# Altium PCB PCB2.PcbDoc (part 1 of 4)
Units mm, origin at the board's own origin, x right, y up, seen from the top; angles counter-clockwise.
Board outline 100 x 100 mm, 4 copper layers (TOP-SIG, GND1, GND2, BOT-SIG), stack 1.586 mm thick; 331 components, 152 nets, 869 pads, 934 vias.
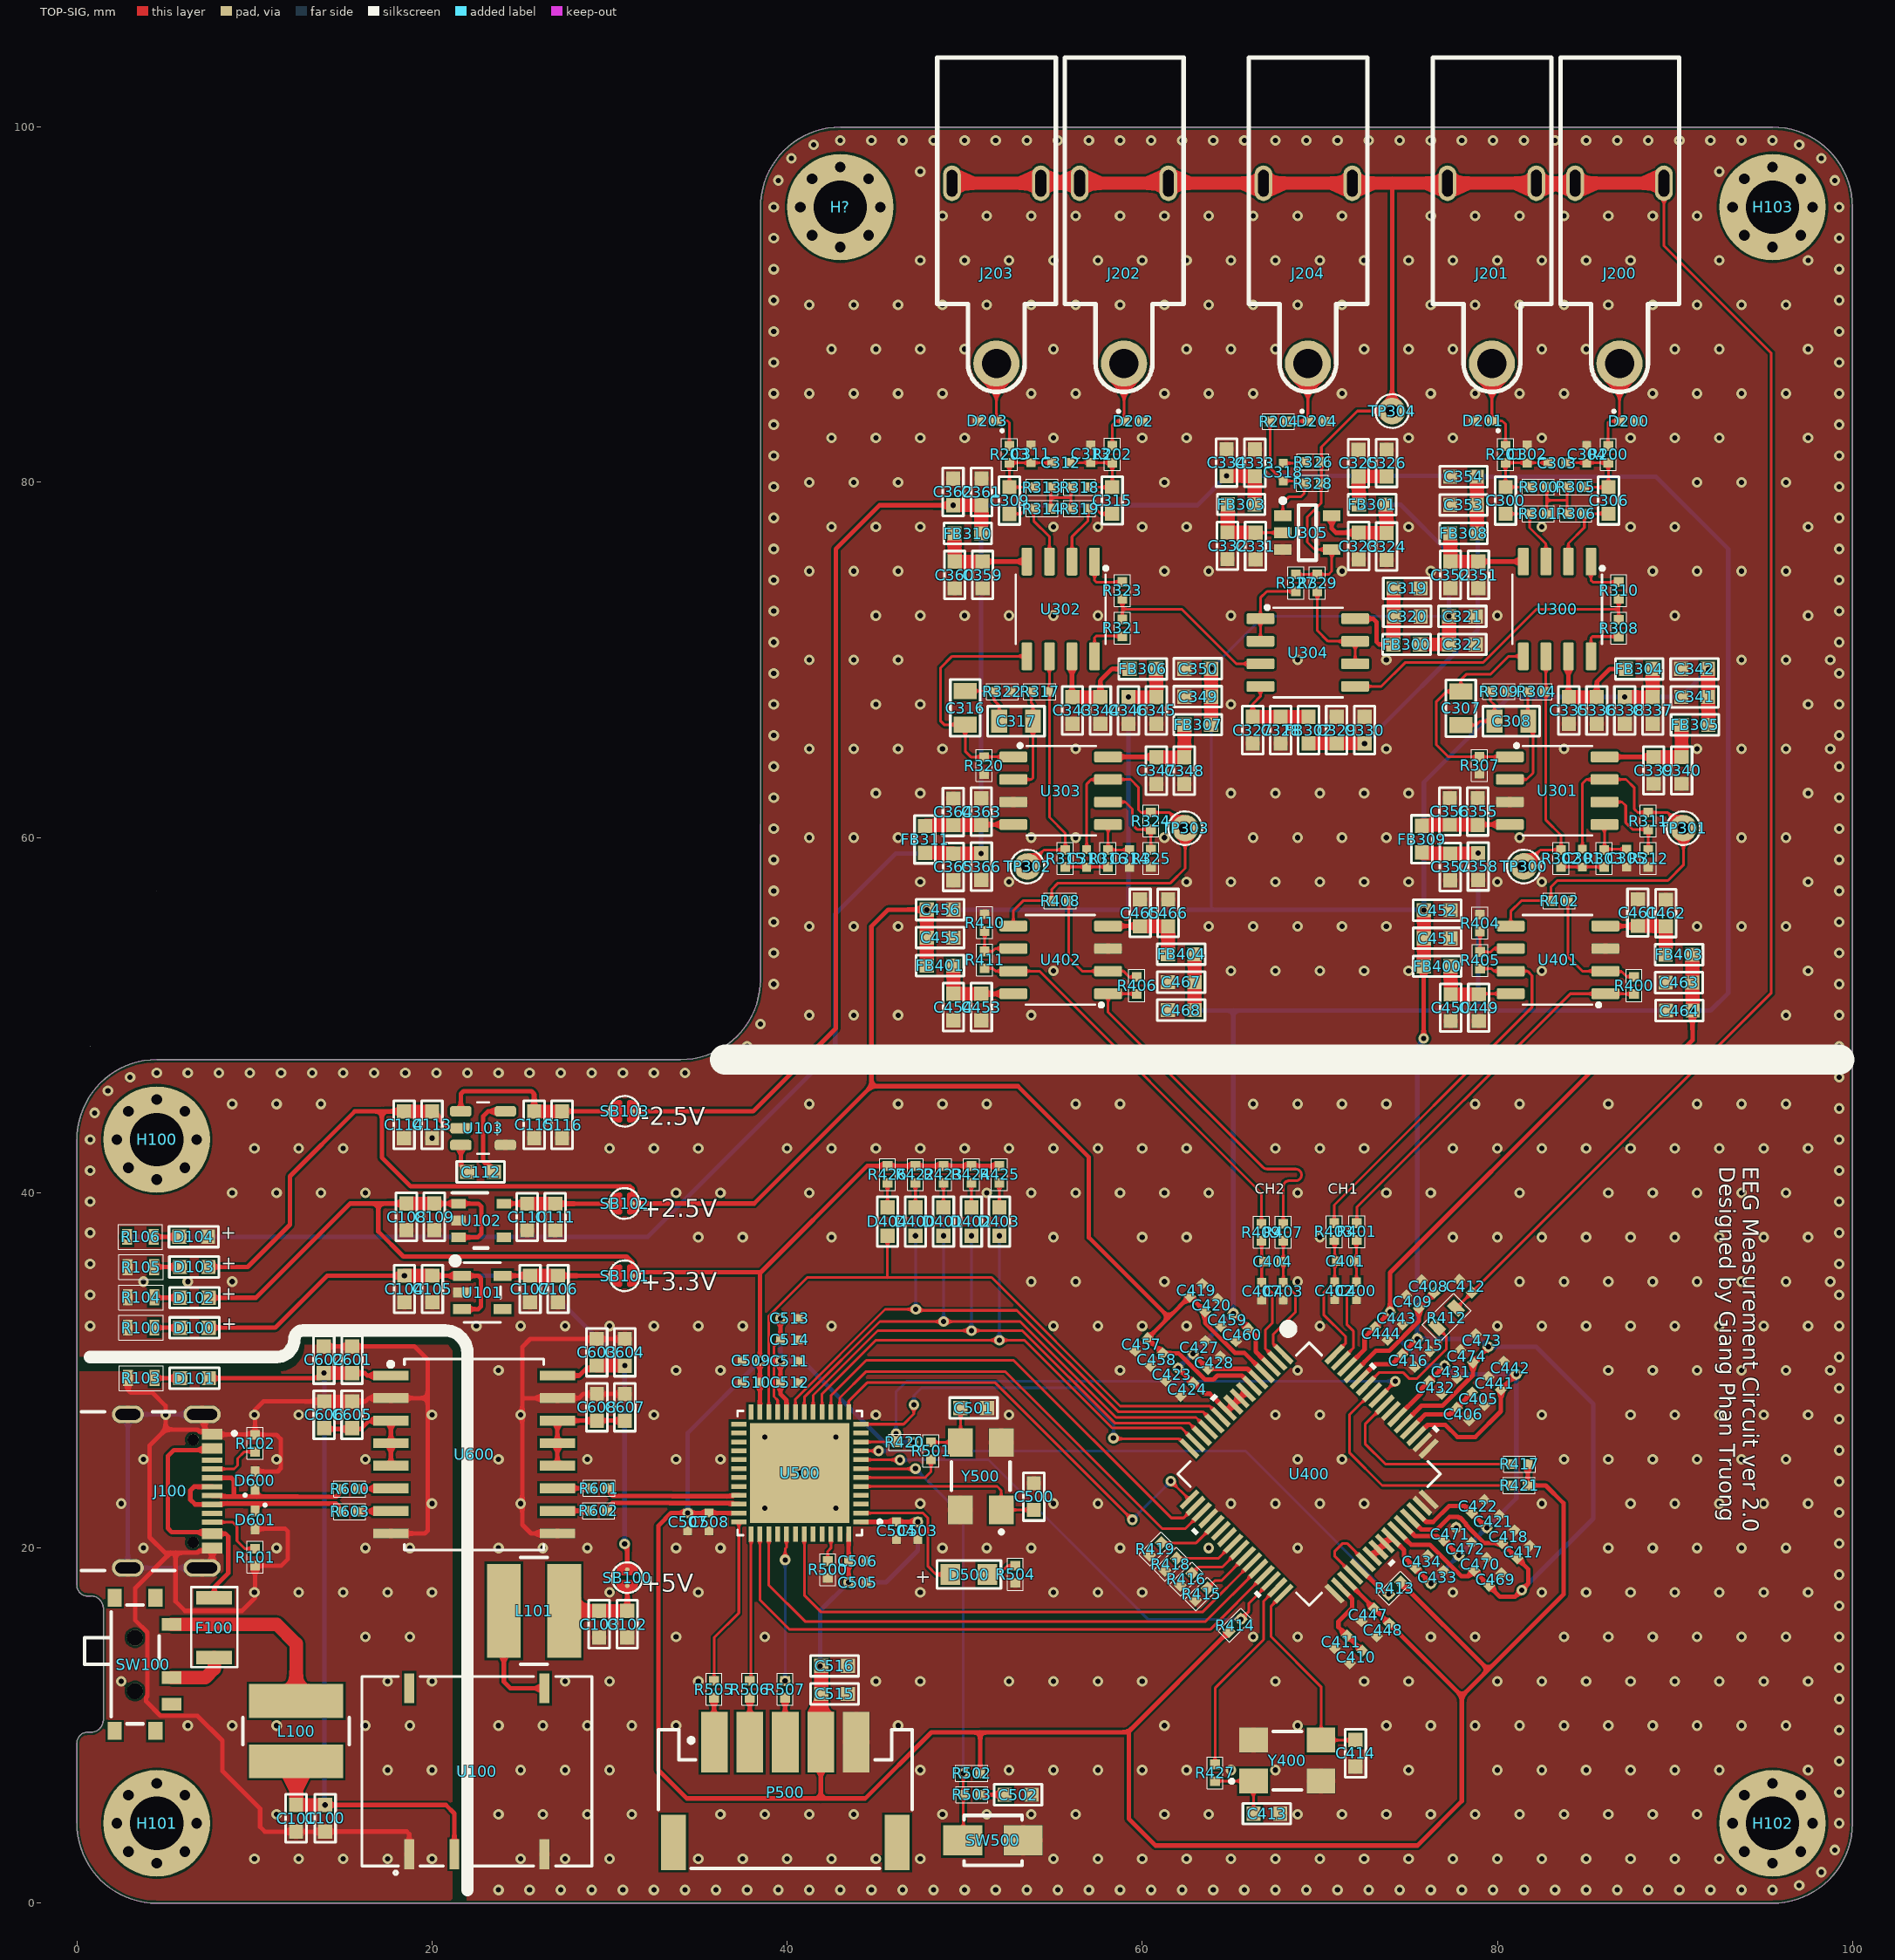
[diagram p0: TOP-SIG view]
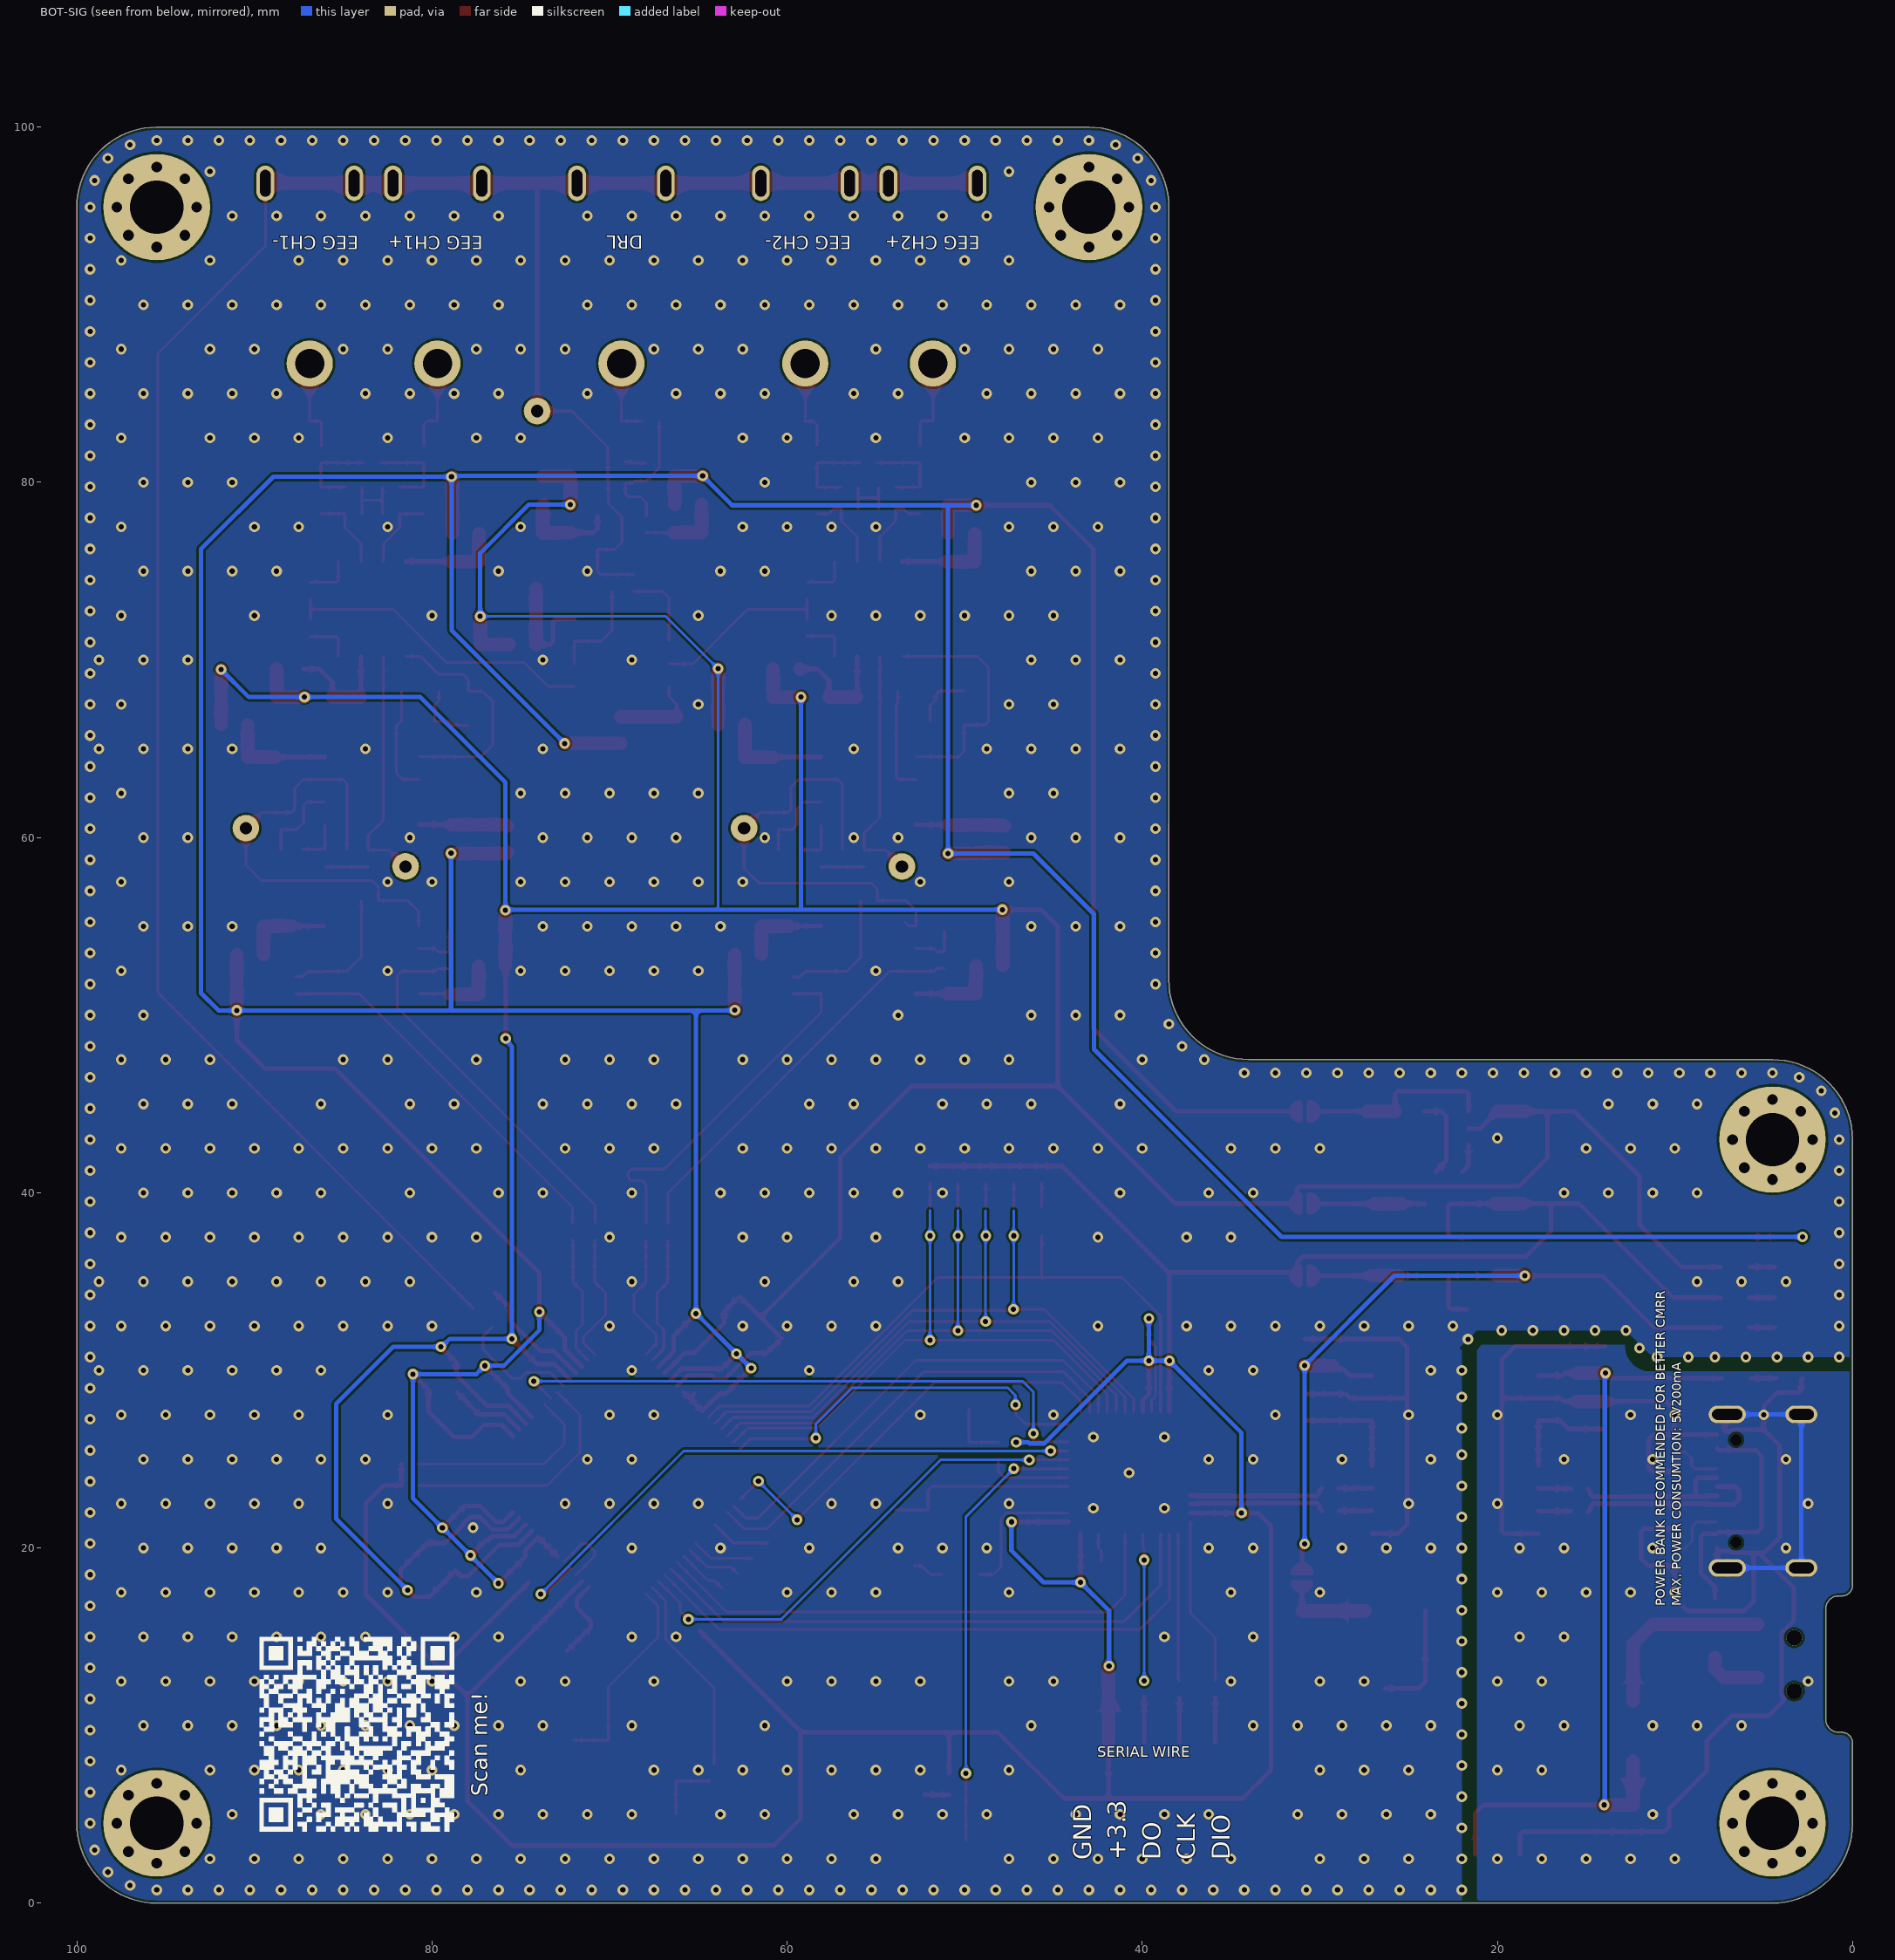
[diagram p1: BOT-SIG view, seen from below]
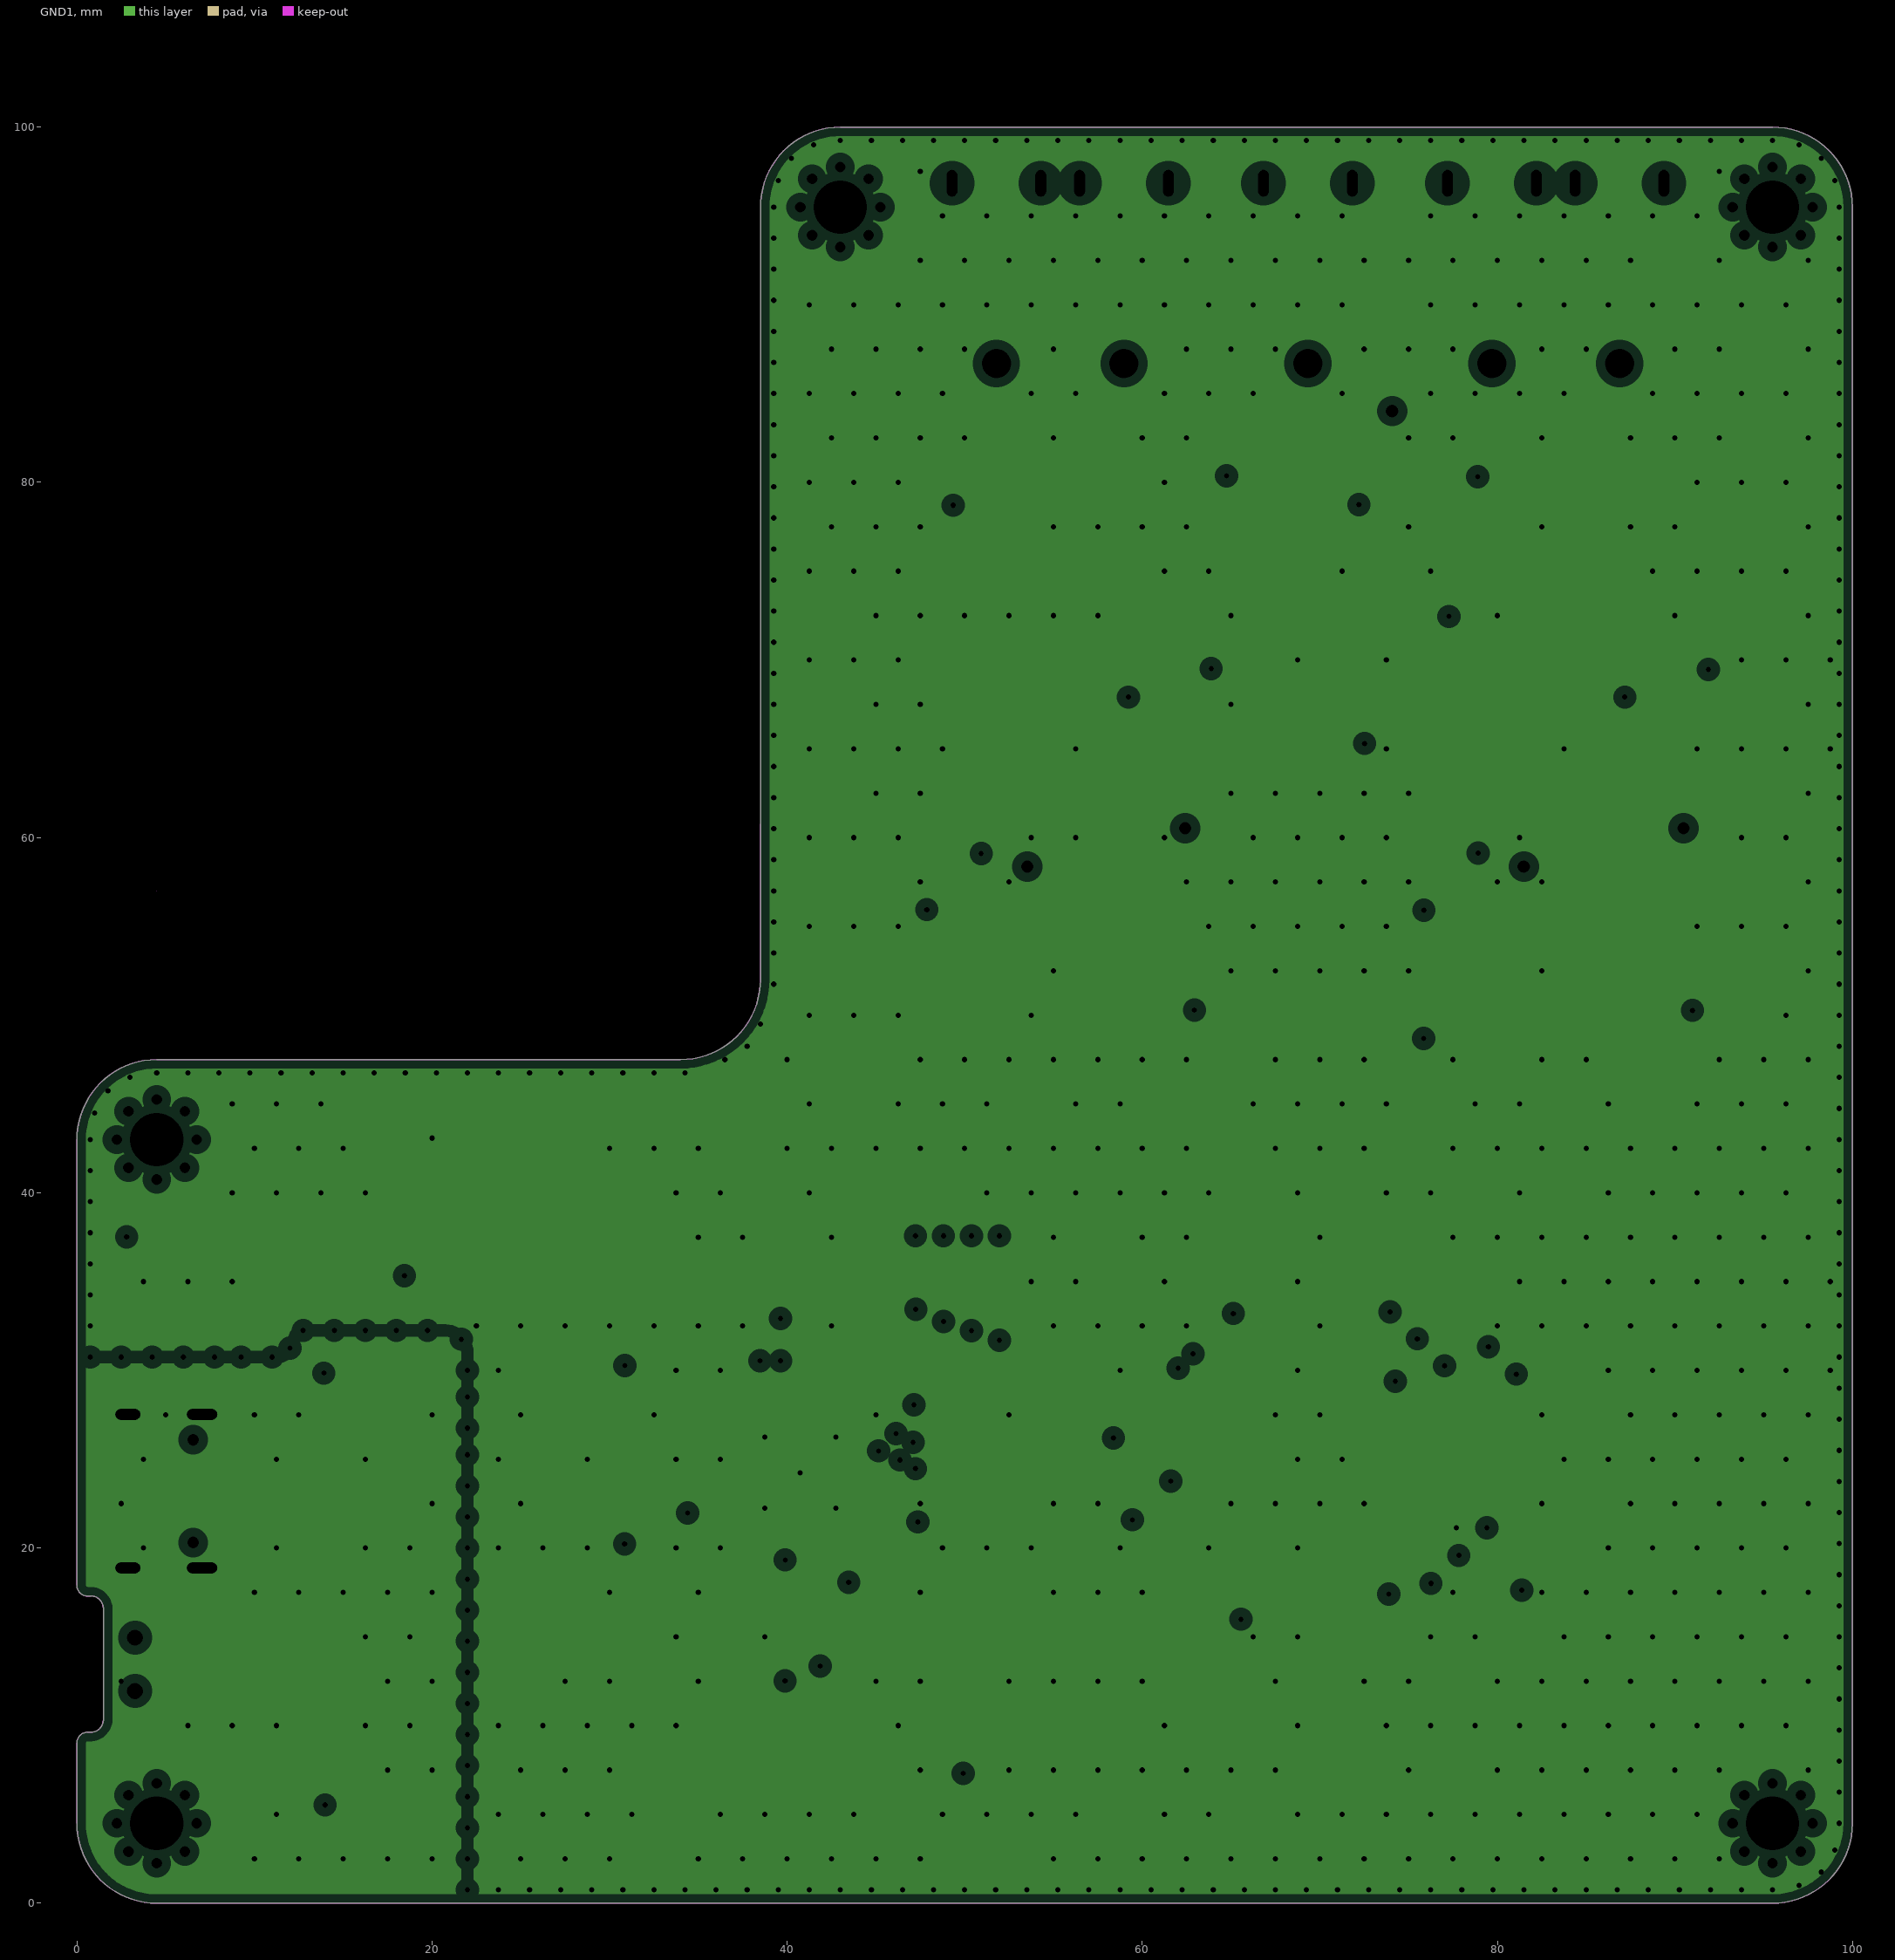
[diagram p2: GND1, clearances drawn from the general rule]
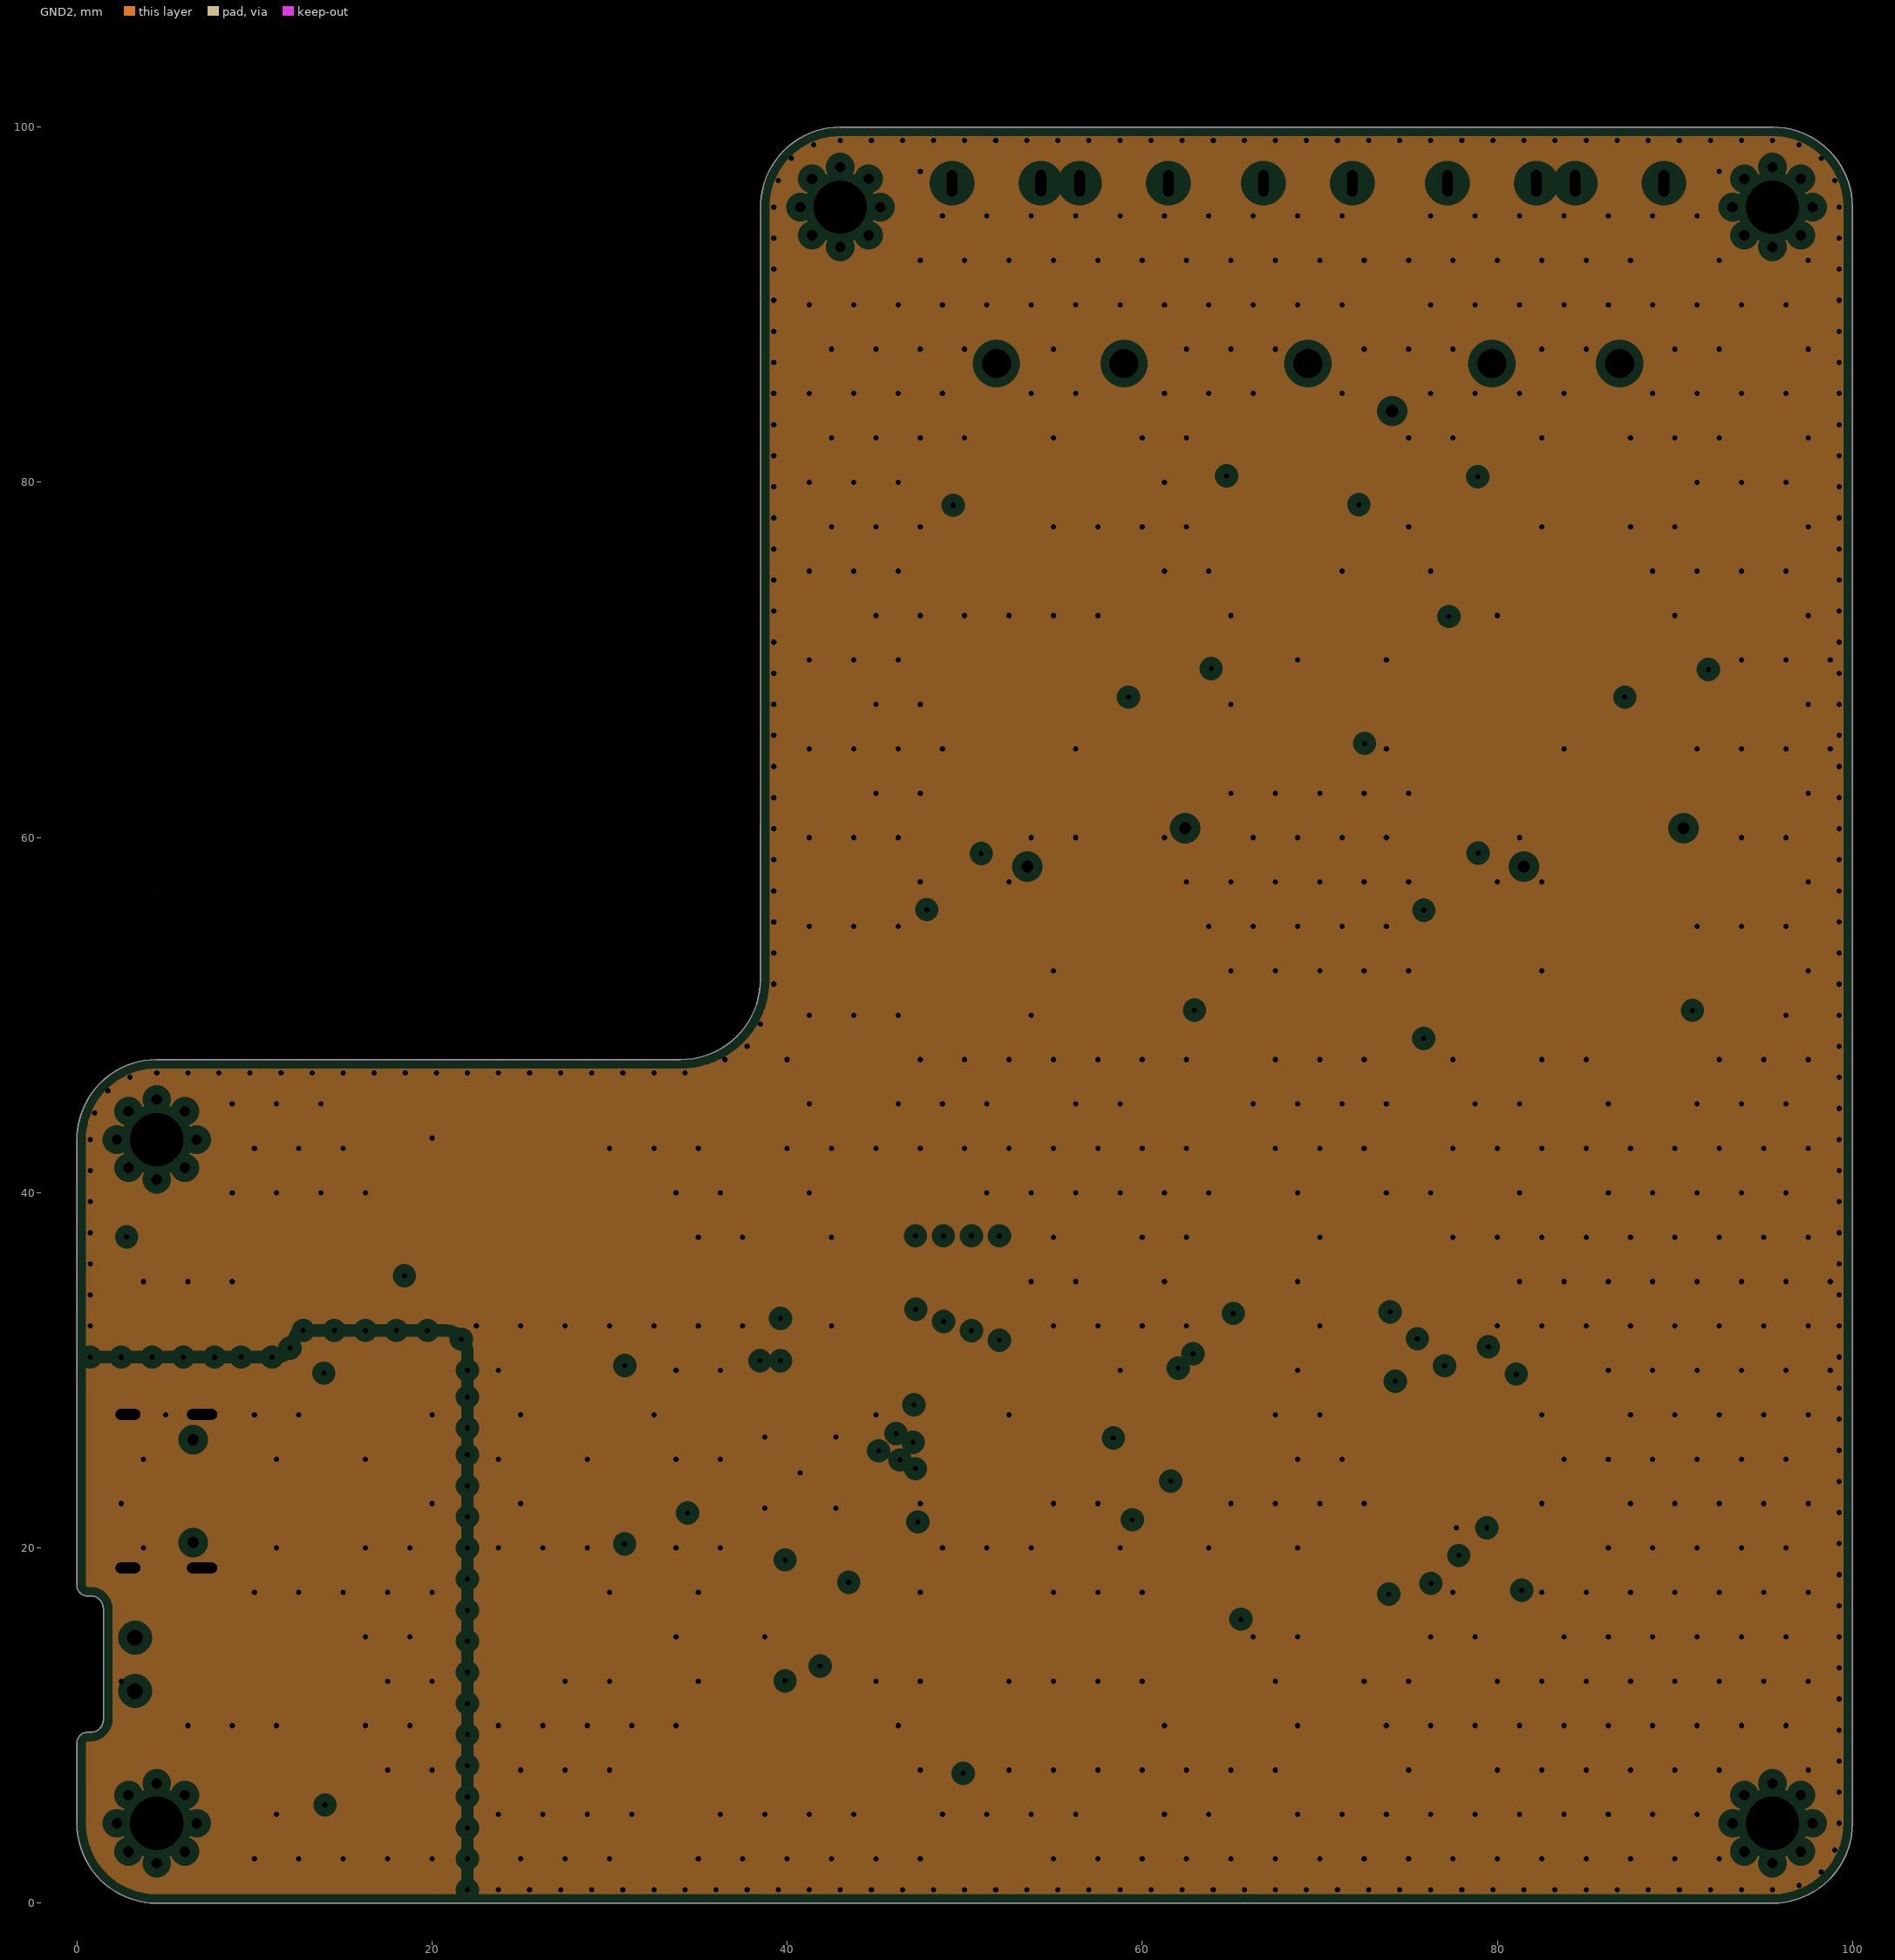
[diagram p3: GND2, clearances drawn from the general rule]
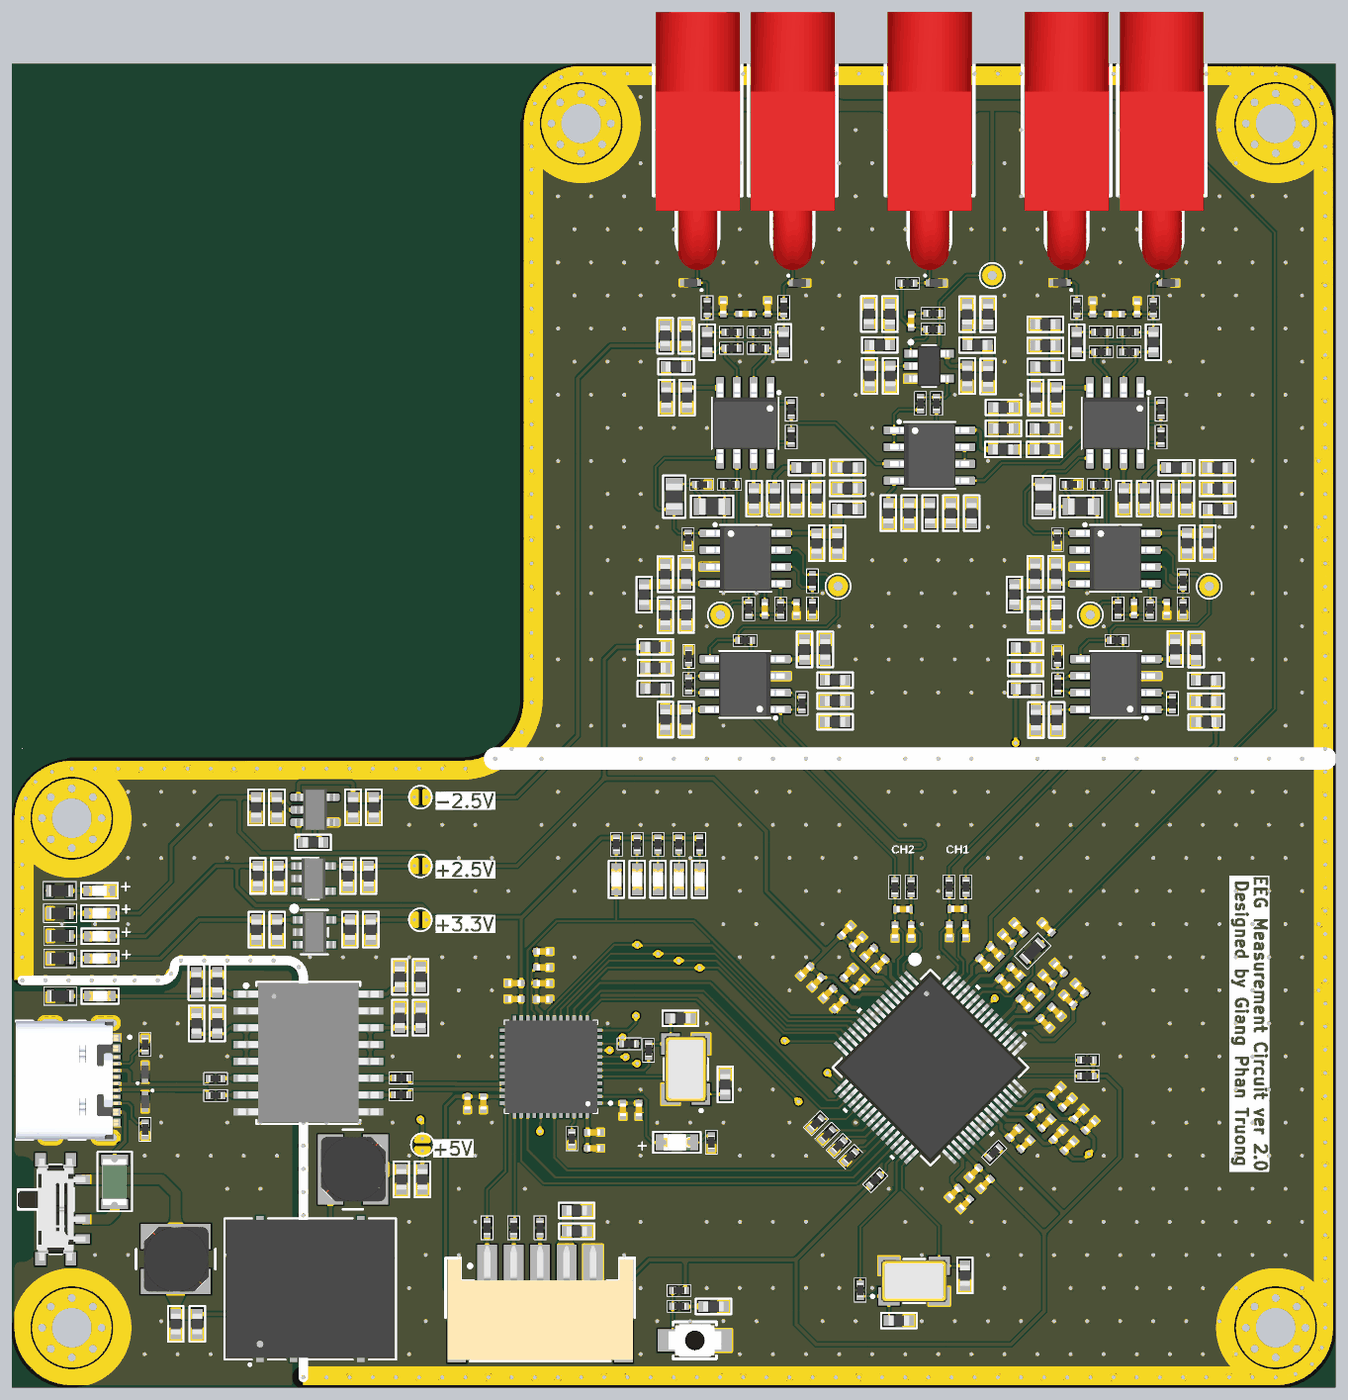
[diagram p6: 3D render of the assembled board from above, using the file's embedded part models]

## Layer stack, top to bottom
Top Solder: solder mask 0.0069, Solder Resist, Dk 3.5
TOP-SIG: signal copper 0.035
Dielectric 2: prepreg 0.2104, PP-006, Dk 4.1
GND1: plane copper 0.0152, net (Multiple Nets)
Dielectric 1: dielectric 1.065, FR-4, Dk 4.8
GND2: plane copper 0.0152, net (Multiple Nets)
Dielectric 3: prepreg 0.2104, PP-006, Dk 4.1
BOT-SIG: signal copper 0.035
Bottom Solder: solder mask 0.0069, Solder Resist, Dk 3.5

## Board outline
0,4.5 0,9.025 cw(c0.6,9.025) 0.6,9.625 0.775,9.625 ccw(c0.775,10.35) 1.5,10.35 1.5,16.575 ccw(c0.775,16.575) 0.775,17.3 0.6,17.3 cw(c0.6,17.9) 0,17.9 0,43 cw(c4.5,43) 4.5,47.5 34,47.5 ccw(c34,52) 38.5,52 38.5,60.75 38.5,95.5 cw(c43,95.5) 43,100 95.5,100 cw(c95.5,95.5) 100,95.5 100,4.5 cw(c95.5,4.5) 95.5,0 4.5,0 cw(c4.5,4.5)

## Design rules (kind name [scope] priority, off if disabled: settings)
Clearance [All] p1: gap=0.125 ignorepadtopadclearanceinfootprint=TRUE
DiffPairsRouting DiffPairsRouting_USB [InDifferentialPairClass('All Differential Pairs')] p1: maxlimit=0.127 minlimit=0.127 mostfreqgap=0.127 toplayer_minwidth=0.263 toplayer_maxwidth=0.263 toplayer_prefwidth=0.263 bottomlayer_minwidth=0.263 bottomlayer_maxwidth=0.263 bottomlayer_prefwidth=0.263 impedanceprofiledriven=TRUE impedanceprofileid={04F33A00-17A3-4157-AAFC-BDDB0F50402A} impedanceprofilevalue=90.000000 maxuncoupledlength=12.7
PlaneClearance [All] p1: clearance=0.508
PlaneConnect [All] p1: planeconnectstyle=Relief reliefexpansion=0.508 reliefentries=4 reliefconductorwidth=0.254 reliefairgap=0.254
PolygonConnect PolygonConnect_1 [All vs IsNamedPolygon('+5_L04_P004')] p1: connectstyle=Direct reliefconductorwidth=0.254 reliefentries=4 polygonreliefangle="90 Angle" airgapwidth=0.254
PolygonConnect [InNet('+5')] p2: connectstyle=Direct reliefconductorwidth=0.254 reliefentries=4 polygonreliefangle="90 Angle" airgapwidth=0.254
RoutingVias [All] p1: holewidth=0.3 width=0.6 viastyle="Through Hole" minholewidth=0.3 minwidth=0.6 maxholewidth=0.3 maxwidth=0.6
SolderMaskExpansion [All] p1: expansion=0.102 istentingtop=FALSE
SupplyNets "Schematic Supply Nets_28" [InNet('VDD1')] p1: voltage=0.000
SupplyNets "Schematic Supply Nets_27" [InNet('-2.5_U300')] p2: voltage=0.000
SupplyNets "Schematic Supply Nets_25" [InNet('+2.5_U301')] p3: voltage=0.000
SupplyNets "Schematic Supply Nets_24" [InNet('-2.5_U304')] p4: voltage=0.000
SupplyNets "Schematic Supply Nets_23" [InNet('-2.5_U302')] p5: voltage=0.000
SupplyNets "Schematic Supply Nets_21" [InNet('+2.5_U305')] p6: voltage=0.000
SupplyNets "Schematic Supply Nets_20" [InNet('+2.5_U402')] p7: voltage=0.000
SupplyNets "Schematic Supply Nets_19" [InNet('+2.5_U302')] p8: voltage=0.000
SupplyNets "Schematic Supply Nets_18" [InNet('+2.5_U304')] p9: voltage=0.000
SupplyNets "Schematic Supply Nets_17" [InNet('-2.5_U305')] p10: voltage=0.000
SupplyNets "Schematic Supply Nets_16" [InNet('+2.5_U303')] p11: voltage=0.000
SupplyNets "Schematic Supply Nets_15" [InNet('-2.5_U301')] p12: voltage=0.000
SupplyNets "Schematic Supply Nets_14" [InNet('-2.5_U402')] p13: voltage=0.000
SupplyNets "Schematic Supply Nets_12" [InNet('+2.5_U401')] p14: voltage=0.000
SupplyNets "Schematic Supply Nets_11" [InNet('-2.5_U303')] p15: voltage=0.000
SupplyNets "Schematic Supply Nets_10" [InNet('VDD2')] p16: voltage=0.000
SupplyNets "Schematic Supply Nets_8" [InNet('+2.5_U300')] p17: voltage=0.000
SupplyNets "Schematic Supply Nets_7" [InNet('-2.5_U401')] p18: voltage=0.000
SupplyNets "Schematic Supply Nets_6" [InNet('+5_USB')] p19: voltage=0.000
SupplyNets "Schematic Supply Nets_5" [InNet('GND')] p20: voltage=0.000
SupplyNets "Schematic Supply Nets_4" [InNet('+2.5')] p21: voltage=0.000
SupplyNets "Schematic Supply Nets_3" [InNet('-2.5')] p22: voltage=0.000
SupplyNets "Schematic Supply Nets_2" [InNet('+3.3')] p23: voltage=0.000
SupplyNets "Schematic Supply Nets_1" [InNet('USB_GND')] p24: voltage=0.000
SupplyNets "Schematic Supply Nets" [InNet('+5')] p25: voltage=0.000
Width [All] p1: maxlimit=0.75 minlimit=0.15 preferedwidth=0.25
27 further rules are at their usual default settings.

## Classes and differential pairs
component class Designator: ar C100 C101 C102 C103 C104 C105 C106 C107 C108 C109 C110 C111 C112 C113 C114 C115 C116 D100 D101 D102 D103 D104 F100 H100 H101 H102 H103 H? J100 L100 L101 R100 R101 R102 R103 R104 R105 R106 SB100 SB101 SB102 SB103 SW100 U100 U101 U102 U103
differential pair MCU_USB_D: +MCU_USB_D_P -MCU_USB_D_N
differential pair USB_D: +USB_D_P -USB_D_N

## Components (designator, comment, footprint, x,y, rotation, side; value= is the part's Value field where it differs from the comment)
C100 "4.7 uF, 35 VDC" CAP_0603 14.06,4.835 r90 top
C101 "100 nF, 50 VDC" CAP_0603 12.426,4.831 r90 top
C102 "100 nF, 50 VDC" CAP_0603 31.076,15.761 r90 top
C103 "4.7 uF, 35 VDC" CAP_0603 29.491,15.762 r90 top
C104 "2.2 uF, 10 VDC" CAP_0603 18.526,34.631 r90 top
C105 "100 nF, 50 VDC" CAP_0603 20.101,34.631 r90 top
C106 "2.2 uF, 10 VDC" CAP_0603 27.176,34.631 r90 top
C107 "100 nF, 50 VDC" CAP_0603 25.601,34.631 r90 top
C108 "2.2 uF, 10 VDC" CAP_0603 18.638,38.695 r90 top
C109 "100 nF, 50 VDC" CAP_0603 20.213,38.695 r90 top
C110 "100 nF, 50 VDC" CAP_0603 25.443,38.683 r90 top
C111 "2.2 uF, 10 VDC" CAP_0603 27.018,38.683 r90 top
C112 "2.2 uF, 10 VDC" CAP_0603 22.789,41.099 r0 top
C113 "2.2 uF, 10 VDC" CAP_0603 20.081,43.881 r90 top
C114 "100 nF, 50 VDC" CAP_0603 18.506,43.881 r90 top
C115 "100 nF, 50 VDC" CAP_0603 25.833,43.881 r90 top
C116 "2.2 uF, 10 VDC" CAP_0603 27.407,43.879 r90 top
C300 "4.7 uF, 35 VDC" CAP_0603 80.538,79.027 r90 top
C301 "10nF" WCAP-CSGP_0402_L1W0.5H0.5 84.792,58.846 r90 top value="10nF, 50V"
C302 "22pF" WCAP-CSGP_0402_L1W0.5H0.5 81.678,81.595 r270 top value="22pF, 50V"
C303 "220pF" WCAP-CSGP_0402_L1W0.5H0.5 83.357,81.097 r180 top value="220pF, 50V"
C304 "22pF" WCAP-CSGP_0402_L1W0.5H0.5 85.036,81.587 r90 top value="22pF, 50V"
C305 "10nF" WCAP-CSGP_0402_L1W0.5H0.5 87.277,58.846 r90 top value="10nF, 50VDC"
C306 "4.7 uF, 35 VDC" CAP_0603 86.34,79.027 r90 top
C307 "33 uF, 6.3 VDC" CAP_0805 77.969,67.257 r270 top
C308 "33 uF, 6.3 VDC" CAP_0805 80.814,66.576 r0 top
C309 "4.7 uF, 35 VDC" CAP_0603 52.599,79.027 r90 top
C310 "10nF" WCAP-CSGP_0402_L1W0.5H0.5 56.873,58.828 r90 top value="10nF, 50VDC"
C311 "22pF" WCAP-CSGP_0402_L1W0.5H0.5 53.74,81.611 r270 top value="22pF, 50V"
C312 "220pF" WCAP-CSGP_0402_L1W0.5H0.5 55.419,81.12 r180 top value="220pF, 50V"
C313 "22pF" WCAP-CSGP_0402_L1W0.5H0.5 57.098,81.619 r90 top value="22pF, 50V"
C314 "10nF" WCAP-CSGP_0402_L1W0.5H0.5 59.282,58.828 r90 top value="10nF, 50VDC"
C315 "4.7 uF, 35 VDC" CAP_0603 58.387,79.031 r90 top
C316 "33 uF, 6.3 VDC" CAP_0805 50.007,67.327 r90 top
C317 "33 uF, 6.3 VDC" CAP_0805 52.922,66.575 r0 top
C318 "1nF" WCAP-CSGP_0402_L1W0.5H0.5 67.941,80.581 r90 top value="1nF, 25V"
C319 "100 nF, 50 VDC" CAP_0603 74.974,73.958 r0 top
C320 "10 uF, 10 VDC" CAP_0603 74.874,72.53 r180 top
C321 "100 nF, 50 VDC" CAP_0603 78.08,72.377 r0 top
C322 "10 uF, 10 VDC" CAP_0603 77.98,70.955 r180 top
C323 "100 nF, 50 VDC" CAP_0603 72.111,76.362 r270 top
C324 "10 uF, 10 VDC" CAP_0603 73.838,76.435 r90 top
C325 "100 nF, 50 VDC" CAP_0603 72.254,81.134 r90 top
C326 "10 uF, 10 VDC" CAP_0603 73.686,81.036 r270 top
C327 "100 nF, 50 VDC" CAP_0603 66.145,65.999 r270 top
C328 "10 uF, 10 VDC" CAP_0603 67.872,66.099 r90 top
C329 "100 nF, 50 VDC" CAP_0603 71.022,66.099 r90 top
C330 "10 uF, 10 VDC" CAP_0603 72.444,65.999 r270 top
C331 "100 nF, 50 VDC" CAP_0603 66.304,76.362 r270 top
C332 "10 uF, 10 VDC" CAP_0603 64.88,76.476 r90 top
C333 "100 nF, 50 VDC" CAP_0603 66.42,81.148 r90 top
C334 "10 uF, 10 VDC" CAP_0603 64.677,81.061 r270 top
C335 "100 nF, 50 VDC" CAP_0603 83.952,67.111 r270 top
C336 "10 uF, 10 VDC" CAP_0603 85.679,67.211 r90 top
C337 "100 nF, 50 VDC" CAP_0603 88.676,67.111 r270 top
C338 "10 uF, 10 VDC" CAP_0603 87.254,67.211 r90 top
C339 "100 nF, 50 VDC" CAP_0603 88.727,63.731 r270 top
C340 "10 uF, 10 VDC" CAP_0603 90.454,63.832 r90 top
C341 "100 nF, 50 VDC" CAP_0603 91.064,67.998 r180 top
C342 "10 uF, 10 VDC" CAP_0603 91.154,69.42 r0 top
C343 "100 nF, 50 VDC" CAP_0603 55.995,67.11 r270 top
C344 "10 uF, 10 VDC" CAP_0603 57.722,67.21 r90 top
C345 "100 nF, 50 VDC" CAP_0603 60.719,67.108 r270 top
C346 "10 uF, 10 VDC" CAP_0603 59.297,67.21 r90 top
C347 "100 nF, 50 VDC" CAP_0603 60.719,63.719 r270 top
C348 "10 uF, 10 VDC" CAP_0603 62.447,63.818 r90 top
C349 "100 nF, 50 VDC" CAP_0603 63.082,68.01 r180 top
C350 "10 uF, 10 VDC" CAP_0603 63.183,69.432 r0 top
C351 "100 nF, 50 VDC" CAP_0603 78.858,74.74 r270 top
C352 "10 uF, 10 VDC" CAP_0603 77.435,74.841 r90 top
C353 "100 nF, 50 VDC" CAP_0603 78.047,78.806 r180 top
C354 "10 uF, 10 VDC" CAP_0603 78.146,80.243 r0 top
C355 "100 nF, 50 VDC" CAP_0603 78.974,61.518 r90 top
C356 "10 uF, 10 VDC" CAP_0603 77.246,61.42 r270 top
C357 "100 nF, 50 VDC" CAP_0603 77.272,58.295 r270 top
C358 "10 uF, 10 VDC" CAP_0603 79,58.421 r90 top
C359 "100 nF, 50 VDC" CAP_0603 50.936,74.735 r270 top
C360 "10 uF, 10 VDC" CAP_0603 49.514,74.837 r90 top
C361 "100 nF, 50 VDC" CAP_0603 51.024,79.509 r90 top
C362 "10 uF, 10 VDC" CAP_0603 49.272,79.409 r270 top
C363 "100 nF, 50 VDC" CAP_0603 51.011,61.509 r90 top
C364 "10 uF, 10 VDC" CAP_0603 49.284,61.393 r270 top
C365 "100 nF, 50 VDC" CAP_0603 49.29,58.296 r270 top
C366 "10 uF, 10 VDC" CAP_0603 51.017,58.413 r90 top
C400 "220pF" WCAP-CSGP_0402_L1W0.5H0.5 72.065,34.48 r90 top value="270pF, 50V"
C401 "680pF" WCAP-CSGP_0402_L1W0.5H0.5 71.451,36.159 r0 top value="680pF, 50V"
C402 "220pF" WCAP-CSGP_0402_L1W0.5H0.5 70.84,34.48 r270 top value="270pF, 50V"
C403 "220pF" WCAP-CSGP_0402_L1W0.5H0.5 67.95,34.45 r90 top value="270pF, 50V"
C404 "680pF" WCAP-CSGP_0402_L1W0.5H0.5 67.33,36.129 r0 top value="680pF, 50V"
C405 "1μF" WCAP-CSGP_0402_L1W0.5H0.5 78.93,28.4 r135 top value="1uF, 16V"
C406 "100nF" WCAP-CSGP_0402_L1W0.5H0.5 78.062,27.533 r315 top value="100nF, 50V"
C407 "220pF" WCAP-CSGP_0402_L1W0.5H0.5 66.726,34.45 r270 top value="270pF, 50V"
C408 "1μF" WCAP-CSGP_0402_L1W0.5H0.5 76.096,34.726 r315 top value="1uF, 16V"
C409 "100nF" WCAP-CSGP_0402_L1W0.5H0.5 75.227,33.868 r135 top value="100nF, 50V"
C410 "1μF" WCAP-CSGP_0402_L1W0.5H0.5 72.041,13.861 r45 top value="1uF, 16V"
C411 "100nF" WCAP-CSGP_0402_L1W0.5H0.5 71.187,14.71 r225 top value="100nF, 50V"
C412 "100nF" WCAP-CSGP_0402_L1W0.5H0.5 78.21,34.741 r315 top value="100nF, 50V"
C413 "27 pF, 50 VDC" CAP_0603 66.968,5.118 r180 top
C414 "27 pF, 50 VDC" CAP_0603 72.087,8.495 r90 top
C415 "1μF" WCAP-CSGP_0402_L1W0.5H0.5 75.846,31.426 r315 top value="1uF, 16V"
C416 "100nF" WCAP-CSGP_0402_L1W0.5H0.5 74.989,30.552 r135 top value="100nF, 50V"
C417 "1μF" WCAP-CSGP_0402_L1W0.5H0.5 81.47,19.78 r45 top value="1uF, 16V"
C418 "100nF" WCAP-CSGP_0402_L1W0.5H0.5 80.62,20.64 r225 top value="100nF, 50V"
C419 "1μF" WCAP-CSGP_0402_L1W0.5H0.5 63.035,34.516 r45 top value="1uF, 16V"
C420 "100nF" WCAP-CSGP_0402_L1W0.5H0.5 63.893,33.671 r225 top value="100nF, 50V"
C421 "1μF" WCAP-CSGP_0402_L1W0.5H0.5 79.765,21.491 r45 top value="1uF, 16V"
C422 "100nF" WCAP-CSGP_0402_L1W0.5H0.5 78.914,22.342 r225 top value="100nF, 50V"
C423 "1μF" WCAP-CSGP_0402_L1W0.5H0.5 61.671,29.773 r225 top value="1uF, 16V"
C424 "100nF" WCAP-CSGP_0402_L1W0.5H0.5 62.524,28.923 r45 top value="100nF, 50V"
C427 "1μF" WCAP-CSGP_0402_L1W0.5H0.5 63.208,31.3 r45 top value="1uF, 16V"
C428 "100nF" WCAP-CSGP_0402_L1W0.5H0.5 64.052,30.441 r225 top value="100nF, 50V"
C431 "1μF" WCAP-CSGP_0402_L1W0.5H0.5 77.38,29.91 r315 top value="1uF, 16V"
C432 "100nF" WCAP-CSGP_0402_L1W0.5H0.5 76.506,29.024 r135 top value="100nF, 50V"
C433 "1μF" WCAP-CSGP_0402_L1W0.5H0.5 76.611,18.359 r45 top value="1uF, 16V"
C434 "100nF" WCAP-CSGP_0402_L1W0.5H0.5 75.733,19.233 r225 top value="100nF, 50V"
C441 "1μF" WCAP-CSGP_0402_L1W0.5H0.5 79.848,29.276 r135 top value="1uF, 16V"
C442 "100nF" WCAP-CSGP_0402_L1W0.5H0.5 80.715,30.145 r315 top value="100nF, 50V"
C443 "1μF" WCAP-CSGP_0402_L1W0.5H0.5 74.31,32.94 r315 top value="1uF, 16V"
C444 "100nF" WCAP-CSGP_0402_L1W0.5H0.5 73.46,32.07 r135 top value="100nF, 50V"
C447 "1μF" WCAP-CSGP_0402_L1W0.5H0.5 72.706,16.237 r225 top value="1uF, 16V"
C448 "100nF" WCAP-CSGP_0402_L1W0.5H0.5 73.564,15.384 r45 top value="100nF, 50V"
C449 "100 nF, 50 VDC" CAP_0603 78.874,50.37 r270 top
C450 "10 uF, 10 VDC" CAP_0603 77.452,50.47 r90 top
C451 "100 nF, 50 VDC" CAP_0603 76.662,54.255 r0 top
C452 "10 uF, 10 VDC" CAP_0603 76.561,55.982 r180 top
C453 "100 nF, 50 VDC" CAP_0603 50.864,50.407 r270 top
C454 "10 uF, 10 VDC" CAP_0603 49.442,50.507 r90 top
C455 "100 nF, 50 VDC" CAP_0603 48.668,54.291 r0 top
C456 "10 uF, 10 VDC" CAP_0603 48.566,56.019 r180 top
C457 "1μF" WCAP-CSGP_0402_L1W0.5H0.5 59.948,31.456 r225 top value="1uF, 16V"
C458 "100nF" WCAP-CSGP_0402_L1W0.5H0.5 60.808,30.614 r45 top value="100nF, 50V"
C459 "1μF" WCAP-CSGP_0402_L1W0.5H0.5 64.776,32.851 r225 top value="1uF, 16V"
C460 "100nF" WCAP-CSGP_0402_L1W0.5H0.5 65.629,32.002 r45 top value="100nF, 50V"
C461 "100 nF, 50 VDC" CAP_0603 87.991,55.823 r90 top
C462 "10 uF, 10 VDC" CAP_0603 89.413,55.696 r270 top
C463 "100 nF, 50 VDC" CAP_0603 90.175,51.911 r180 top
C464 "10 uF, 10 VDC" CAP_0603 90.302,50.184 r0 top
C465 "100 nF, 50 VDC" CAP_0603 59.957,55.805 r90 top
C466 "10 uF, 10 VDC" CAP_0603 61.38,55.706 r270 top
C467 "100 nF, 50 VDC" CAP_0603 62.141,51.936 r180 top
C468 "10 uF, 10 VDC" CAP_0603 62.241,50.209 r0 top
C469 "1μF" WCAP-CSGP_0402_L1W0.5H0.5 79.881,18.229 r45 top value="1uF, 16V"
C470 "100nF" WCAP-CSGP_0402_L1W0.5H0.5 79.036,19.087 r225 top value="100nF, 50V"
C471 "1μF" WCAP-CSGP_0402_L1W0.5H0.5 77.33,20.794 r45 top value="1uF, 16V"
C472 "100nF" WCAP-CSGP_0402_L1W0.5H0.5 78.183,19.937 r225 top value="100nF, 50V"
C473 "1μF" WCAP-CSGP_0402_L1W0.5H0.5 79.14,31.68 r135 top value="1uF, 16V"
C474 "100nF" WCAP-CSGP_0402_L1W0.5H0.5 78.272,30.802 r315 top value="100nF, 50V"
C500 "27 pF, 50 VDC" CAP_0603 53.821,22.841 r270 top
C501 "27 pF, 50 VDC" CAP_0603 50.452,27.961 r180 top
C502 "100 nF, 50 VDC" CAP_0603 53.057,6.033 r0 top
C503 "4.7μF" WCAP-CSGP_0402_L1W0.5H0.5 47.364,20.97 r90 top value="4.7uF, 10V"
C504 "100nF" WCAP-CSGP_0402_L1W0.5H0.5 46.16,20.97 r90 top value="100nF, 50V"
C505 "4.7μF" WCAP-CSGP_0402_L1W0.5H0.5 43.97,18.066 r180 top value="4.7uF, 10V"
C506 "100nF" WCAP-CSGP_0402_L1W0.5H0.5 43.97,19.27 r180 top value="100nF, 50V"
C507 "4.7μF" WCAP-CSGP_0402_L1W0.5H0.5 34.406,21.47 r90 top value="4.7uF, 10V"
C508 "100nF" WCAP-CSGP_0402_L1W0.5H0.5 35.61,21.47 r90 top value="100nF, 50V"
C509 "4.7μF" WCAP-CSGP_0402_L1W0.5H0.5 37.97,30.544 r0 top value="4.7uF, 10V"
C510 "100nF" WCAP-CSGP_0402_L1W0.5H0.5 37.97,29.34 r0 top value="100nF, 50V"
C511 "1μF" WCAP-CSGP_0402_L1W0.5H0.5 40.124,30.524 r0 top value="1uF, 16V"
C512 "100nF" WCAP-CSGP_0402_L1W0.5H0.5 40.124,29.32 r180 top value="100nF, 50V"
C513 "1μF" WCAP-CSGP_0402_L1W0.5H0.5 40.124,32.932 r0 top value="1uF, 16V"
C514 "10nF" WCAP-CSGP_0402_L1W0.5H0.5 40.124,31.728 r180 top value="10nF, 50V"
C515 "1 uF, 16 VDC" CAP_0603 42.622,11.862 r180 top
C516 "100 nF, 50 VDC" CAP_0603 42.721,13.285 r0 top
C601 "1 uF, 16 VDC" CAP_0603 15.429,30.548 r270 top
C602 "100 nF, 50 VDC" CAP_0603 13.986,30.648 r90 top
C603 "1 uF, 16 VDC" CAP_0603 29.209,30.968 r270 top
C604 "100 nF, 50 VDC" CAP_0603 30.936,31.068 r90 top
C605 "100 nF, 50 VDC" CAP_0603 15.576,27.551 r90 top
C606 "1 uF, 16 VDC" CAP_0603 13.849,27.449 r270 top
C607 "1 uF, 16 VDC" CAP_0603 30.788,27.871 r270 top
C608 "100 nF, 50 VDC" CAP_0603 29.365,27.971 r90 top
D100 "Blue, 3.2V" WL-SMCW_0603_H=0.7mm 6.624,32.401 r0 top
D101 "Red, 2V" WL-SMCW_0603_H=0.7mm 6.632,29.56 r0 top
D102 "Yellow, 2V" WL-SMCW_0603_H=0.7mm 6.621,34.09 r0 top
D103 "Green, 3.2V" WL-SMCW_0603_H=0.7mm 6.611,35.826 r0 top
D104 "Pink" WL-SMCW_0603_H=0.7mm 6.584,37.526 r0 top
D200 "TPD1E1B04DPYR" DIO_TPD1E05U06DPYR 87.406,83.441 r0 top
D201 "TPD1E1B04DPYR" DIO_TPD1E05U06DPYR 79.202,83.467 r180 top
D202 "TPD1E1B04DPYR" DIO_TPD1E05U06DPYR 59.509,83.441 r0 top
D203 "TPD1E1B04DPYR" DIO_TPD1E05U06DPYR 51.271,83.466 r180 top
D204 "TPD1E1B04DPYR" DIO_TPD1E05U06DPYR 69.84,83.44 r0 top
D400 "Yellow, 2V" WL-SMCW_0603_H=0.7mm 47.23,38.38 r90 top
D401 "Red, 2V" WL-SMCW_0603_H=0.7mm 48.805,38.38 r90 top
D402 "Green, 3.2V" WL-SMCW_0603_H=0.7mm 50.38,38.38 r90 top
D403 "Blue, 3.2V" WL-SMCW_0603_H=0.7mm 51.955,38.38 r90 top
D404 "Pink" WL-SMCW_0603_H=0.7mm 45.656,38.38 r90 top
D500 "Blue, 3.2V" WL-SMCW_0805 50.24,18.51 r180 top
D600 "TPD1E1B04DPYR" DIO_TPD1E05U06DPYR 10.038,23.811 r90 top
D601 "TPD1E1B04DPYR" DIO_TPD1E05U06DPYR 10.04,21.581 r270 top
F100 "6V, 0.35A" Fuse_SMD_1206 7.731,15.512 r270 top
FB300 "120 Ohms, 2 A" FER_0603 74.94,70.803 r0 top
FB301 "120 Ohms, 2 A" FER_0603 72.9,78.824 r180 top
FB302 "120 Ohms, 2 A" FER_0603 69.294,65.999 r270 top
FB303 "120 Ohms, 2 A" FER_0603 65.621,78.686 r0 top
FB304 "120 Ohms, 2 A" FER_0603 88.042,69.42 r0 top
FB305 "120 Ohms, 2 A" FER_0603 91.181,66.271 r0 top
FB306 "120 Ohms, 2 A" FER_0603 60.084,69.42 r0 top
FB307 "120 Ohms, 2 A" FER_0603 63.181,66.282 r0 top
FB308 "120 Ohms, 2 A" FER_0603 78.146,77.051 r0 top
FB309 "120 Ohms, 2 A" FER_0603 75.672,59.857 r270 top
FB310 "120 Ohms, 2 A" FER_0603 50.225,77.047 r0 top
FB311 "120 Ohms, 2 A" FER_0603 47.689,59.844 r270 top
FB400 "120 Ohms, 2 A" FER_0603 76.562,52.832 r180 top
FB401 "120 Ohms, 2 A" FER_0603 48.561,52.869 r180 top
FB403 "120 Ohms, 2 A" FER_0603 90.281,53.334 r0 top
FB404 "120 Ohms, 2 A" FER_0603 62.247,53.358 r0 top
H100 "Mounting Hole 3mm" "3mm with via" 4.5,43 r0 top
H101 "Mounting Hole 3mm" "3mm with via" 4.5,4.5 r0 top
H102 "Mounting Hole 3mm" "3mm with via" 95.5,4.5 r0 top
H103 "Mounting Hole 3mm" "3mm with via" 95.5,95.5 r0 top
H? "Mounting Hole 3mm" "3mm with via" 43,95.5 r0 top
J100 "USB4105-GF-A" GCT_USB4105-GF-A 2.875,23.202 r270 top value="USB-C 2.0 24-Pin (16+8 Dummy)"
J200 "DIN42802 1.5mm" "DIN42802-1.5MM SOCKET" 86.881,86.692 r90 top value="DIN42802 3-Pin Female Socket"
J201 "DIN42802 1.5mm" "DIN42802-1.5MM SOCKET" 79.693,86.692 r90 top value="DIN42802 3-Pin Female Socket"
J202 "DIN42802 1.5mm" "DIN42802-1.5MM SOCKET" 58.975,86.691 r90 top value="DIN42802 3-Pin Female Socket"
J203 "DIN42802 1.5mm" "DIN42802-1.5MM SOCKET" 51.787,86.691 r90 top value="DIN42802 3-Pin Female Socket"
J204 "DIN42802 1.5mm" "DIN42802-1.5MM SOCKET" 69.33,86.692 r90 top value="DIN42802 3-Pin Female Socket"
L100 "22uH, 1A" Inductor_CDRH4D28 12.354,9.693 r270 top
L101 "47uH, 1A" Inductor_CDRH4D28 25.749,16.462 r0 top
P500 "PH2.0mm 5-PIN" 620105131822 39.9,5.87 r0 top
R100 "Resistor 1 KOhm 0603 1%" R0603 3.622,32.406 r180 top value="1 KOhm/0603/1%"
R101 "Resistor 5.1 KOhm 0402" R0402 10.04,19.485 r90 top value="5.1 KOhm/0402/1%"
R102 "Resistor 5.1 KOhm 0402" R0402 10.04,25.895 r270 top value="5.1 KOhm/0402/1%"
R103 "Resistor 1 KOhm 0603 1%" R0603 3.629,29.568 r0 top value="1 KOhm/0603/1%"
R104 "Resistor 1 KOhm 0603 1%" R0603 3.618,34.111 r180 top value="1 KOhm/0603/1%"
R105 "Resistor 1 KOhm 0603 1%" R0603 3.609,35.816 r180 top value="1 KOhm/0603/1%"
R106 "Resistor 1 KOhm 0603 1%" R0603 3.582,37.521 r180 top value="1 KOhm/0603/1%"
R200 "Resistor 100 KOhm 0402 1%" R0402 86.252,81.578 r270 top value="100 KOhm/0402/1%"
R201 "Resistor 100 KOhm 0402 1%" R0402 80.461,81.578 r270 top value="100 KOhm/0402/1%"
R202 "Resistor 100 KOhm 0402 1%" R0402 58.314,81.582 r270 top value="100 KOhm/0402/1%"
R203 "Resistor 100 KOhm 0402 1%" R0402 52.523,81.578 r270 top value="100 KOhm/0402/1%"
R204 "Resistor 100 KOhm 0402 1%" R0402 67.672,83.428 r180 top value="100 KOhm/0402/1%"
R300 "Resistor 1 MOhm 0402 1%" R0402 82.308,79.74 r180 top value="1 MOhm/0402/1%"
R301 "Resistor 1 MOhm 0402 1%" R0402 82.306,78.237 r180 top value="1 MOhm/0402/1%"
R302 "Resistor 4.22 KOhm 0402 1%" R0402 83.588,58.828 r270 top value="4.22 KOhm/0402/1%"
R303 "Resistor 60.4 KOhm 0402 1%" R0402 86.009,58.829 r90 top value="60.4 KOhm/0402/1%"
R304 "Resistor 138 KOhm 0402 1%" R0402 82.188,68.22 r0 top value="138 KOhm/0402/1%"
R305 "Resistor 1 MOhm 0402 1%" R0402 84.413,79.74 r180 top value="1 MOhm/0402/1%"
R306 "Resistor 1 MOhm 0402 1%" R0402 84.424,78.237 r180 top value="1 MOhm/0402/1%"
R307 "Resistor 0 Ohm 0402" R0402 78.999,64.069 r90 top value="0 Ohm/0402/Jumper"
R308 "Resistor 2.77 KOhm 0402 1%" R0402 86.837,71.795 r270 top value="2.77 KOhm/0402/0.1%"
R309 "Resistor 54.9 KOhm 0402 1%" R0402 80.084,68.227 r180 top value="54.9 KOhm/0402/1%"
R310 "Resistor 2.77 KOhm 0402 1%" R0402 86.837,73.912 r90 top value="2.77 KOhm/0402/0.1%"
R311 "Resistor 100 KOhm 0402 1%" R0402 88.499,60.937 r90 top value="100 KOhm/0402/1%"
R312 "Resistor 10 KOhm 0402 1%" R0402 88.501,58.829 r90 top value="10 KOhm/0402/1%"
R313 "Resistor 1 MOhm 0402 1%" R0402 54.363,79.723 r180 top value="1 MOhm/0402/1%"
R314 "Resistor 1 MOhm 0402 1%" R0402 54.363,78.518 r180 top value="1 MOhm/0402/1%"
R315 "Resistor 4.22 KOhm 0402 1%" R0402 55.669,58.828 r270 top value="4.22 KOhm/0402/1%"
R316 "Resistor 60.4 KOhm 0402 1%" R0402 58.078,58.828 r90 top value="60.4 KOhm/0402/1%"
R317 "Resistor 138 KOhm 0402 1%" R0402 54.231,68.219 r0 top value="138 KOhm/0402/1%"
R318 "Resistor 1 MOhm 0402 1%" R0402 56.468,79.723 r180 top value="1 MOhm/0402/1%"
R319 "Resistor 1 MOhm 0402 1%" R0402 56.471,78.518 r180 top value="1 MOhm/0402/1%"
R320 "Resistor 0 Ohm 0402" R0402 51.093,64.06 r90 top value="0 Ohm/0402/Jumper"
R321 "Resistor 2.77 KOhm 0402 1%" R0402 58.88,71.806 r270 top value="2.77 KOhm/0402/0.1%"
R322 "Resistor 54.9 KOhm 0402 1%" R0402 52.127,68.219 r180 top value="54.9 KOhm/0402/1%"
R323 "Resistor 2.77 KOhm 0402 1%" R0402 58.88,73.911 r90 top value="2.77 KOhm/0402/0.1%"
R324 "Resistor 100 KOhm 0402 1%" R0402 60.487,60.936 r90 top value="100 KOhm/0402/1%"
R325 "Resistor 10 KOhm 0402 1%" R0402 60.487,58.831 r90 top value="10 KOhm/0402/1%"
R326 "Resistor 10 KOhm 0402 1%" R0402 69.617,81.152 r0 top value="10 KOhm/0402/1%"
R327 "Resistor 10 KOhm 0402 1%" R0402 68.65,74.338 r270 top value="10 KOhm/0402/1%"
R328 "Resistor 1 MOhm 0402 1%" R0402 69.596,79.947 r0 top value="1 MOhm/0402/1%"
R329 "Resistor 10 KOhm 0402 1%" R0402 69.861,74.338 r270 top value="10 KOhm/0402/1%"
R400 "Resistor 100 KOhm 0402 1%" R0402 87.702,51.671 r270 top value="100 KOhm/0402/1%"
R401 "Resistor 10 Ohm 0402 1%" R0402 72.085,37.813 r270 top value="10 Ohm/0402/1%"
R402 "Resistor 10 KOhm 0402 1%" R0402 83.495,56.441 r0 top value="10 KOhm/0402/1%"
R403 "Resistor 10 Ohm 0402 1%" R0402 70.815,37.813 r270 top value="10 Ohm/0402/1%"
R404 "Resistor 11 KOhm 0402 5%" R0402 79.02,55.195 r270 top value="11 KOhm/0402/5%"
R405 "Resistor 100 KOhm 0402 1%" R0402 79.026,53.088 r270 top value="100 KOhm/0402/1%"
R406 "Resistor 100 KOhm 0402 1%" R0402 59.694,51.671 r270 top value="100 KOhm/0402/1%"
R407 "Resistor 10 Ohm 0402 1%" R0402 67.942,37.783 r270 top value="10 Ohm/0402/1%"
R408 "Resistor 10 KOhm 0402 1%" R0402 55.385,56.44 r0 top value="10 KOhm/0402/1%"
R409 "Resistor 10 Ohm 0402 1%" R0402 66.714,37.783 r270 top value="10 Ohm/0402/1%"
R410 "Resistor 11 KOhm 0402 5%" R0402 51.128,55.221 r270 top value="11 KOhm/0402/5%"
R411 "Resistor 100 KOhm 0402 1%" R0402 51.128,53.114 r270 top value="100 KOhm/0402/1%"
R412 "Resistor 49.9 Ohm 0603 1%" R0603 77.139,32.968 r225 top value="49.9 Ohm/0603/1%"
R413 "Resistor 10 KOhm 0402 1%" R0402 74.218,17.736 r225 top value="10 KOhm/0402/1%"
R414 "Resistor 10 KOhm 0402 1%" R0402 65.224,15.654 r45 top value="10 KOhm/0402/1%"
R415 "Resistor 10 KOhm 0402 1%" R0402 63.336,17.406 r45 top value="10 KOhm/0402/1%"
R416 "Resistor 10 KOhm 0402 1%" R0402 62.471,18.245 r45 top value="10 KOhm/0402/1%"
R417 "Resistor 10 KOhm 0402 1%" R0402 81.245,24.73 r180 top value="10 KOhm/0402/1%"
R418 "Resistor 10 KOhm 0402 1%" R0402 61.604,19.082 r45 top value="10 KOhm/0402/1%"
R419 "Resistor 10 KOhm 0402 1%" R0402 60.747,19.95 r45 top value="10 KOhm/0402/1%"
R420 "Resistor 10 KOhm 0402 1%" R0402 46.624,25.957 r180 top value="10 KOhm/0402/1%"
R421 "Resistor 10 KOhm 0402 1%" R0402 81.236,23.525 r0 top value="10 KOhm/0402/1%"
R422 "Resistor 220 Ohm 0402 5%" R0402 47.23,41.033 r90 top value="220 Ohm/0402/5%"
R423 "Resistor 220 Ohm 0402 5%" R0402 48.81,41.033 r90 top value="220 Ohm/0402/5%"
R424 "Resistor 100 Ohm 0402 1%" R0402 50.38,41.033 r90 top value="100 Ohm/0402/1%"
R425 "Resistor 100 Ohm 0402 1%" R0402 51.961,41.033 r90 top value="100 Ohm/0402/1%"
R426 "Resistor 220 Ohm 0402 5%" R0402 45.66,41.033 r90 top value="220 Ohm/0402/5%"
R427 "Resistor 24 Ohm 0402 1%" R0402 64.102,7.345 r90 top value="24 Ohm/0402/1%"
R500 "Resistor 10 KOhm 0402 1%" R0402 42.29,18.785 r270 top value="10 KOhm/0402/1%"
R501 "Resistor 24 Ohm 0402 1%" R0402 48.104,25.474 r90 top value="24 Ohm/0402/1%"
R502 "Resistor 10 KOhm 0402 1%" R0402 50.4,7.32 r180 top value="10 KOhm/0402/1%"
R503 "Resistor 100 Ohm 0402 1%" R0402 50.406,6.115 r0 top value="100 Ohm/0402/1%"
R504 "Resistor 100 Ohm 0402 1%" R0402 52.849,18.52 r270 top value="100 Ohm/0402/1%"
R505 "Resistor 24 Ohm 0402 1%" R0402 35.886,12.051 r270 top value="24 Ohm/0402/1%"
R506 "Resistor 24 Ohm 0402 1%" R0402 37.902,12.051 r270 top value="24 Ohm/0402/1%"
R507 "Resistor 24 Ohm 0402 1%" R0402 39.89,12.051 r270 top value="24 Ohm/0402/1%"
R600 "Resistor 24 Ohm 0402 1%" R0402 15.37,23.33 r0 top value="24 Ohm/0402/1%"
R601 "Resistor 24 Ohm 0402 1%" R0402 29.409,23.37 r0 top value="24 Ohm/0402/1%"
R602 "Resistor 24 Ohm 0402 1%" R0402 29.389,22.1 r0 top value="24 Ohm/0402/1%"
R603 "Resistor 24 Ohm 0402 1%" R0402 15.37,22.05 r0 top value="24 Ohm/0402/1%"
SB100 "Open-circuit Solder Bridge" SolderBridgeOpen#1 31,18.33 r90 top
SB101 "Open-circuit Solder Bridge" SolderBridgeOpen#2 30.847,35.327 r0 top
SB102 "Open-circuit Solder Bridge" SolderBridgeOpen#3 30.847,39.397 r0 top
SB103 "Open-circuit Solder Bridge" SolderBridgeOpen#1 30.847,44.59 r0 top
SW100 "450404015514" 450404015514 3.28,13.45 r90 top
SW500 "Button" Button_3x4mm_SMD_2P 51.596,3.542 r0 top
TP300 "Testpoint_TH" TestPoint_THTPad_D1.5mm_Drill0.7mm 81.488,58.371 r90 top
TP301 "Testpoint_TH" TestPoint_THTPad_D1.5mm_Drill0.7mm 90.48,60.53 r90 top
TP302 "Testpoint_TH" TestPoint_THTPad_D1.5mm_Drill0.7mm 53.531,58.371 r90 top
TP303 "Testpoint_TH" TestPoint_THTPad_D1.5mm_Drill0.7mm 62.421,60.53 r90 top
TP304 "Testpoint_TH" TestPoint_THTPad_D1.5mm_Drill0.7mm 74.074,84.014 r90 top
U100 "NXE2S0505MC-R7" NXE2_SINGLE_SURFACE_MUR 22.53,7.43 r90 top
U101 "RT9013-33GB" SOT-23-5_RIT-L 22.833,34.389 r0 top
U102 "TPS7A0525PDBVR" DBV0005A_L 22.776,38.441 r0 top
U103 "TPS60403DBVR" SOT95P280X145-5N 22.88,43.639 r0 top
U300 "INA128UA/2K5" SOIC-8 83.368,72.875 r270 top
U301 "OPA2735AIDR" SOIC-8 83.368,62.639 r0 top
U302 "INA128UA/2K5" SOIC-8 55.411,72.874 r270 top
U303 "OPA2735AIDR" SOIC-8 55.411,62.638 r0 top
U304 "OPA2735AIDR" SOIC-8 69.326,70.419 r0 top
U305 "OPA735AIDBVR" SOT-23 69.296,77.167 r0 top
U400 "24 Bit Analog to Digital Converter 4 Input 4 Sigma-Delta" ST-64-2_ADI 69.397,24.166 r315 top locked value=AD7768-4BSTZ-RL
U401 "OPA2735AIDR" SOIC-8 83.419,53.114 r180 top
U402 "OPA2735AIDR" SOIC-8 55.411,53.113 r180 top
U500 "STM32G431CBU6" QFN50P700X700X60-49N 40.72,24.22 r180 top locked
U600 "ADUM4160BRWZ-RL" SOIC16 22.375,25.265 r0 top
Y400 "32MHz" WE-XTAL_CFPX-104 68.171,8.031 r0 top
Y500 "32MHz" WE-XTAL_CFPX-104 50.908,24.045 r90 top

## Footprints (in the part's own frame and the unit in brackets; to place one, negate y for a bottom-side part, rotate by r counter-clockwise, add the part's x,y. Pads: shape width x height; smd on the part's side, far side on the other; paste and mask are expansions set on the pad)
"3mm with via" [mm]
  round 6 hole 3 mask+1.5: 0(0,0)
450404015514 [mm] "Right angle Slide Switch"
  rect 0.7x1.1 smd: COM(-0.75,-2.05) L1(2.25,-2.05) L2(-2.25,-2.05)
  round 0.9 hole 0.9 unplated: M1(-1.5,0) M2(1.5,0)
  rect 1x0.8 smd: M3(-3.75,1.15) M4(3.75,1.15) M5(-3.75,-1.15) M6(3.75,-1.15)
  silkscreen extent -3.35,-1.35 3.35,2.85, body extent -3.85,-2.25 3.85,2.88, height 1.4
620105131822 [mm] "2.00mm SMT Male Horizontal Shrouded Header, 5p"
  rect 1.5x3.4 smd: 1(-4,3.2) 2(-2,3.2) 3(0,3.2) 4(2,3.2) 5(4,3.2)
  rect 1.4x3.1 smd: MP1(-6.3,-2.45) MP2(6.3,-2.45)
  silkscreen extent -7.15,-3.9 7.15,3.9, body extent -7,-3.8 7,4.8, height 5.57
Button_3x4mm_SMD_2P [mm]
  rect 2.2x1.7 smd: 1(-1.7,0) 2(1.7,0)
  silkscreen extent -1.64,-1.4 1.64,1.4, body extent -2,-1.25 2,1.25, height 1.59
CAP_0603 [mm]
  rect 0.8x0.8 smd: 1(-0.801,0.076) 2(0.699,0.076)
  silkscreen extent -1.4,-0.51 1.3,0.66, body extent -0.85,-0.32 0.75,0.48, height 0.8
CAP_0805 [mm]
  rect 0.9x1.3 smd: 1(-0.975,-0.025) 2(0.925,-0.025)
  silkscreen extent -1.63,-0.86 1.57,0.81, body extent -1.03,-0.65 0.97,0.6, height 0.6
DBV0005A_L [mm]
  rect 0.8x0.55 smd paste+0 mask+0: 1(-1.275,0.95) 2(-1.275,0) 3(-1.275,-0.95) 4(1.275,-0.95) 5(1.275,0.95)
  silkscreen extent -1.63,-1.55 0.38,1.55, body extent -1.5,-1.55 1.5,1.55, height 1.7
"DIN42802-1.5MM SOCKET" [mm]
  oval 2x1 hole 0.6 slot 1.5 at 0 deg: 1(10.15,2.5) 3(10.15,-2.5)
  round 2.6 hole 1.65: 2(0,0)
  silkscreen extent -1.6,-3.35 17.22,3.33, body extent -2.28,-3.19 17.22,3.16, height 6.35
DIO_TPD1E05U06DPYR [mm]
  rect 0.6x0.5 smd: 1(-0.5,0) 2(0.5,0)
  silkscreen extent -0.91,0.48 -0.76,0.63, body extent -0.5,-0.3 0.5,0.3, height 0.45
FER_0603 [mm]
  rect 0.8x0.8 smd: 1(-0.801,0.076) 2(0.699,0.076)
  silkscreen extent -1.4,-0.51 1.3,0.66, body extent -0.85,-0.32 0.75,0.48, height 0.8
Fuse_SMD_1206 [mil] "Fuse SMD, size 1206"
  rect 30x80 smd: 0(-66,0) 1(66,0)
  silkscreen extent -90,-51 87,52, body extent -69,-36 69,36, height 20
GCT_USB4105-GF-A [mm]
  rect 0.6x1.15 smd mask+0.05: A1_B12(-3.2,4.755) A4_B9(-2.4,4.755) B1_A12(3.2,4.755) B4_A9(2.4,4.755)
  rect 0.3x1.15 smd mask+0.05: A5(-1.25,4.755) A6(-0.25,4.755) A7(0.25,4.755) A8(1.25,4.755) B5(1.75,4.755) B6(0.75,4.755) B7(-0.75,4.755) B8(-1.75,4.755)
  oval 1x2.1 hole 0.6 slot 1.7 at 90 deg: SH1(-4.32,4.18) SH2(4.32,4.18)
  oval 1x1.8 hole 0.6 slot 1.4 at 90 deg: SH3(-4.32,0) SH4(4.32,0)
  round 0.65 hole 0.65 unplated: ""(-2.89,3.68) ""(2.89,3.68)
  silkscreen extent -4.47,-2.6 4.47,6.1, body extent -4.47,-2.6 4.47,5.11, height 3.31
Inductor_CDRH4D28 [mm] "SMD Power Inductor, body 4.8x4.8x2.8 mm"
  rect 1.9x5.3 smd: 1(-1.7,0) 2(1.7,0)
  silkscreen extent -0.75,-3 0.75,3, body extent -2.42,-2.42 2.48,2.48, height 2.91
NXE2_SINGLE_SURFACE_MUR [mil]
  rect 66x22 smd paste+0 mask+0: 1(-184,150) 3(-184,50) 7(-184,-150) 8(184,-150) 14(184,150)
  silkscreen extent -229,-255 210,255, body extent -205,-250 205,250, height 190
QFN50P700X700X60-49N [mm]
  rect 0.86x0.27 smd mask+0.05: 1(-3.435,2.75) 2(-3.435,2.25) 3(-3.435,1.75) 4(-3.435,1.25) 5(-3.435,0.75) 6(-3.435,0.25) 7(-3.435,-0.25) 8(-3.435,-0.75) 9(-3.435,-1.25) 10(-3.435,-1.75) 11(-3.435,-2.25) 12(-3.435,-2.75) 25(3.435,-2.75) 26(3.435,-2.25) 27(3.435,-1.75) 28(3.435,-1.25) 29(3.435,-0.75) 30(3.435,-0.25) 31(3.435,0.25) 32(3.435,0.75) 33(3.435,1.25) 34(3.435,1.75) 35(3.435,2.25) 36(3.435,2.75)
  rect 0.27x0.86 smd mask+0.05: 13(-2.75,-3.435) 14(-2.25,-3.435) 15(-1.75,-3.435) 16(-1.25,-3.435) 17(-0.75,-3.435) 18(-0.25,-3.435) 19(0.25,-3.435) 20(0.75,-3.435) 21(1.25,-3.435) 22(1.75,-3.435) 23(2.25,-3.435) 24(2.75,-3.435) 37(2.75,3.435) 38(2.25,3.435) 39(1.75,3.435) 40(1.25,3.435) 41(0.75,3.435) 42(0.25,3.435) 43(-0.25,3.435) 44(-0.75,3.435) 45(-1.25,3.435) 46(-1.75,3.435) 47(-2.25,3.435) 48(-2.75,3.435)
  rect 5.6x5.6 smd paste-4 mask+0.05: 49(0,0)
  silkscreen extent -4.6,-3.5 3.5,3.5, body extent -3.5,-3.5 3.5,3.5, height 0.6
R0402 [mm] "Chip Resistor, 2-Leads, Body 1.00x0.50mm, IPC Medium Density"
  rect 0.55x0.55 smd: 1(-0.475,0) 2(0.475,0)
  silkscreen extent -0.9,-0.45 0.9,0.45, body extent -0.5,-0.25 0.5,0.25, height 0.35
R0603 [mm]
  rect 0.55x0.9 smd: 1(-0.75,0) 2(0.75,0)
  silkscreen extent -1.25,-0.7 1.25,0.7, body extent -0.77,-0.43 0.77,0.43, height 0.45
SOIC16 [mil]
  rect 78x22 smd paste+0 mask+0: 1(-184.5,175) 2(-184.5,125) 3(-184.5,75) 4(-184.5,25) 5(-184.5,-25) 6(-184.5,-75) 7(-184.5,-125) 8(-184.5,-175) 9(184.5,-175) 10(184.5,-125) 11(184.5,-75) 12(184.5,-25) 13(184.5,25) 14(184.5,75) 15(184.5,125) 16(184.5,175)
  silkscreen extent -190,-212 154,212, body extent -209,-206 209,206, height 104
SOIC-8 [mm]
  rrect25% 1.57x0.6 smd: 1(-2.667,1.905) 2(-2.667,0.635) 3(-2.667,-0.635) 4(-2.667,-1.905) 5(2.667,-1.905) 6(2.667,-0.635) 7(2.667,0.635) 8(2.667,1.905)
  silkscreen extent -2.39,-2.52 1.98,2.64, body extent -2.97,-2.45 3.02,2.45, height 1.75
SolderBridgeOpen#1 [mil]
  round 10 smd mask+0: 1(18,0) 2(-18,0)
  TOP-SIG region: -10,20 -10,-20 -19,-20 -30,-9 -30,10 -20,20
  TOP-SIG region: 10,20 10,-20 19,-20 30,-9 30,10 20,20
  TOP-SIG lines w10: -10,20 ccw(c-10,0) -10,-20 -10,20 ; 10,20 cw(c10,0) 10,-20 10,20
  silkscreen extent -34,-34 34,34
SolderBridgeOpen#2 [mil]
  round 10 smd mask+0: 1(18,0) 2(-18,0)
  TOP-SIG region: 10,20 10,-20 19,-20 30,-9 30,10 20,20
  TOP-SIG region: -10,20 -10,-20 -19,-20 -30,-9 -30,10 -20,20
  TOP-SIG lines w10: -10,-20 cw(c-10,0) -10,20 -10,-20 ; 10,-20 ccw(c10,0) 18,18.33 ccw(c10,0) 10,20 10,0 10,-20
  silkscreen extent -34,-34 34,34
SolderBridgeOpen#3 [mil]
  round 10 smd mask+0: 1(18,0) 2(-18,0)
  TOP-SIG region: -10,20 -10,-20 -19,-20 -30,-9 -30,10 -20,20
  TOP-SIG region: 10,20 10,-20 19,-20 30,-9 30,10 20,20
  TOP-SIG lines w10: -17.39,-18.58 ccw(c-10,0) -10,-20 -10,0 -10,20 ccw(c-10,0) -17.39,-18.58 ; 10,-20 ccw(c10,0) 30,0 ccw(c10,0) 18,18.33 ccw(c10,0) 10,20 10,0 10,-20
  silkscreen extent -34,-34 34,34
SOT95P280X145-5N [mm]
  rrect50% 1.21x0.59 smd: 1(-1.255,0.95) 2(-1.255,0) 3(-1.255,-0.95) 4(1.255,-0.95) 5(1.255,0.95)
  silkscreen extent -0.33,-1.45 0.8,1.45, body extent -1.5,-1.55 1.5,1.55, height 1.7
SOT-23 [mm] "SOT23, 5-Leads, Body 2.90x2.80mm, Pitch 0.95mm, IPC Medium Density"
  rect 1x0.6 smd: 1(-1.375,0.95) 2(-1.375,0) 3(-1.375,-0.95) 4(1.375,-0.95) 5(1.375,0.95)
  silkscreen extent -1.5,-1.55 0.5,1.92, body extent -1.5,-1.53 1.5,1.53, height 1.45
SOT-23-5_RIT-L [mil]
  rect 40x22 smd paste+0 mask+0: 1(-45,36.99) 2(-45,0) 3(-45,-36.99) 4(45,-36.99) 5(45,36.99)
  silkscreen extent -67,-66 40,77, body extent -59,-61 59,61, height 67
ST-64-2_ADI [mil]
  rect 53x11 smd paste+0 mask+0: 1(-227.5,147.64) 2(-227.5,127.95) 3(-227.5,108.27) 4(-227.5,88.58) 5(-227.5,68.9) 6(-227.5,49.21) 7(-227.5,29.53) 8(-227.5,9.84) 9(-227.5,-9.84) 10(-227.5,-29.53) 11(-227.5,-49.21) 12(-227.5,-68.9) 13(-227.5,-88.58) 14(-227.5,-108.27) 15(-227.5,-127.95) 16(-227.5,-147.64) 33(227.5,-147.64) 34(227.5,-127.95) 35(227.5,-108.27) 36(227.5,-88.58) 37(227.5,-68.9) 38(227.5,-49.21) 39(227.5,-29.53) 40(227.5,-9.84) 41(227.5,9.84) 42(227.5,29.53) 43(227.5,49.21) 44(227.5,68.9) 45(227.5,88.58) 46(227.5,108.27) 47(227.5,127.95) 48(227.5,147.64)
  rect 11x53 smd paste+0 mask+0: 17(-147.64,-227.5) 18(-127.95,-227.5) 19(-108.27,-227.5) 20(-88.58,-227.5) 21(-68.9,-227.5) 22(-49.21,-227.5) 23(-29.53,-227.5) 24(-9.84,-227.5) 25(9.84,-227.5) 26(29.53,-227.5) 27(49.21,-227.5) 28(68.9,-227.5) 29(88.58,-227.5) 30(108.27,-227.5) 31(127.95,-227.5) 32(147.64,-227.5) 49(147.64,227.5) 50(127.95,227.5) 51(108.27,227.5) 52(88.58,227.5) 53(68.9,227.5) 54(49.21,227.5) 55(29.53,227.5) 56(9.84,227.5) 57(-9.84,227.5) 58(-29.53,227.5) 59(-49.21,227.5) 60(-68.9,227.5) 61(-88.58,227.5) 62(-108.27,227.5) 63(-127.95,227.5) 64(-147.64,227.5)
  silkscreen extent -274,-274 274,274, body extent -240,-240 240,240, height 63
TestPoint_THTPad_D1.5mm_Drill0.7mm [mm]
  round 1.5 / inner round 1.524 / far side round 1.5 hole 0.7 paste-2539.97 mask+0: 1(0,0)
  silkscreen extent -0.95,-0.95 0.95,0.95
WCAP-CSGP_0402_L1W0.5H0.5 [mm] "Ceramic Capacitors, body 1x0.5mm"
  rect 0.5x0.5 smd: 1(-0.5,0) 2(0.5,0)
  body extent -0.5,-0.25 0.5,0.25, height 0.5
WE-XTAL_CFPX-104 [mm] "Quartz Crystal, size CFPX-104, body 5x3.2mm"
  rect 1.6x1.4 smd: 1(-1.9,-1.15) 2(1.9,-1.15) 3(1.9,1.15) 4(-1.9,1.15)
  silkscreen extent -3.24,-1.65 0.8,1.65, body extent -2.5,-1.6 2.5,1.6, height 0.95
WL-SMCW_0603_H=0.7mm [mm] "SMD Mono-color Chip LED, body 1.6x0.8mm"
  rect 0.8x0.8 smd: 1(-0.8,0) 2(0.8,0)
  silkscreen extent -1.4,-0.58 1.4,0.58, body extent -0.8,-0.4 0.8,0.4, height 0.7
WL-SMCW_0805 [mm] "SMD Mono-color Chip LED, body 2.0x1.25mm"
  rect 1.1x1.2 smd: 1(-1.05,0) 2(1.05,0)
  silkscreen extent -1.8,-0.79 1.8,0.79, body extent -1,-0.63 1,0.62, height 0.7